# EAGLE board PCB_KioskMB_r3.2 (EAGLE 8.2.1), part 1 of 3
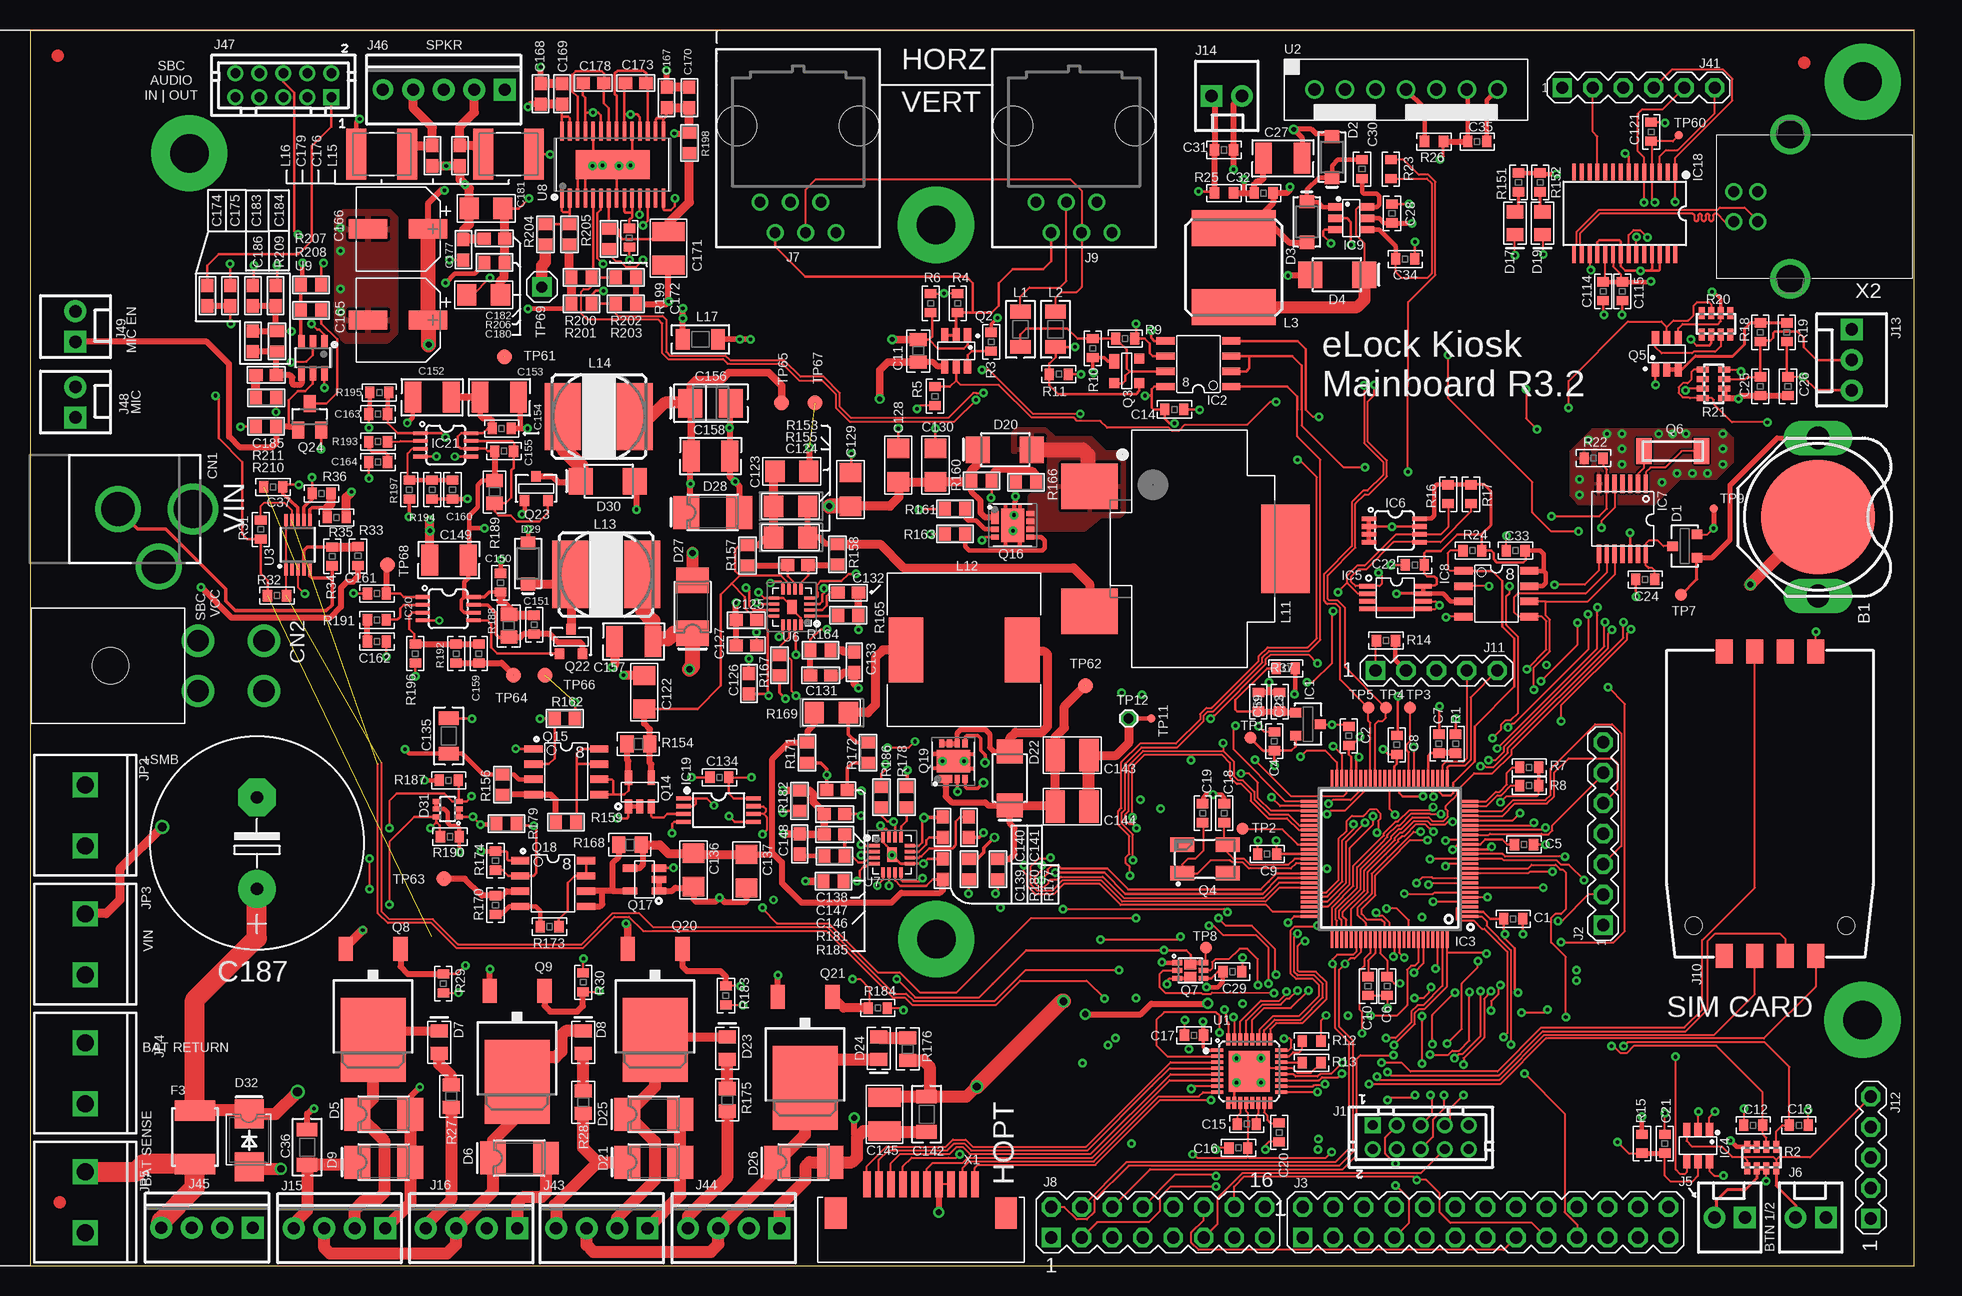
[diagram p0: board, top side]
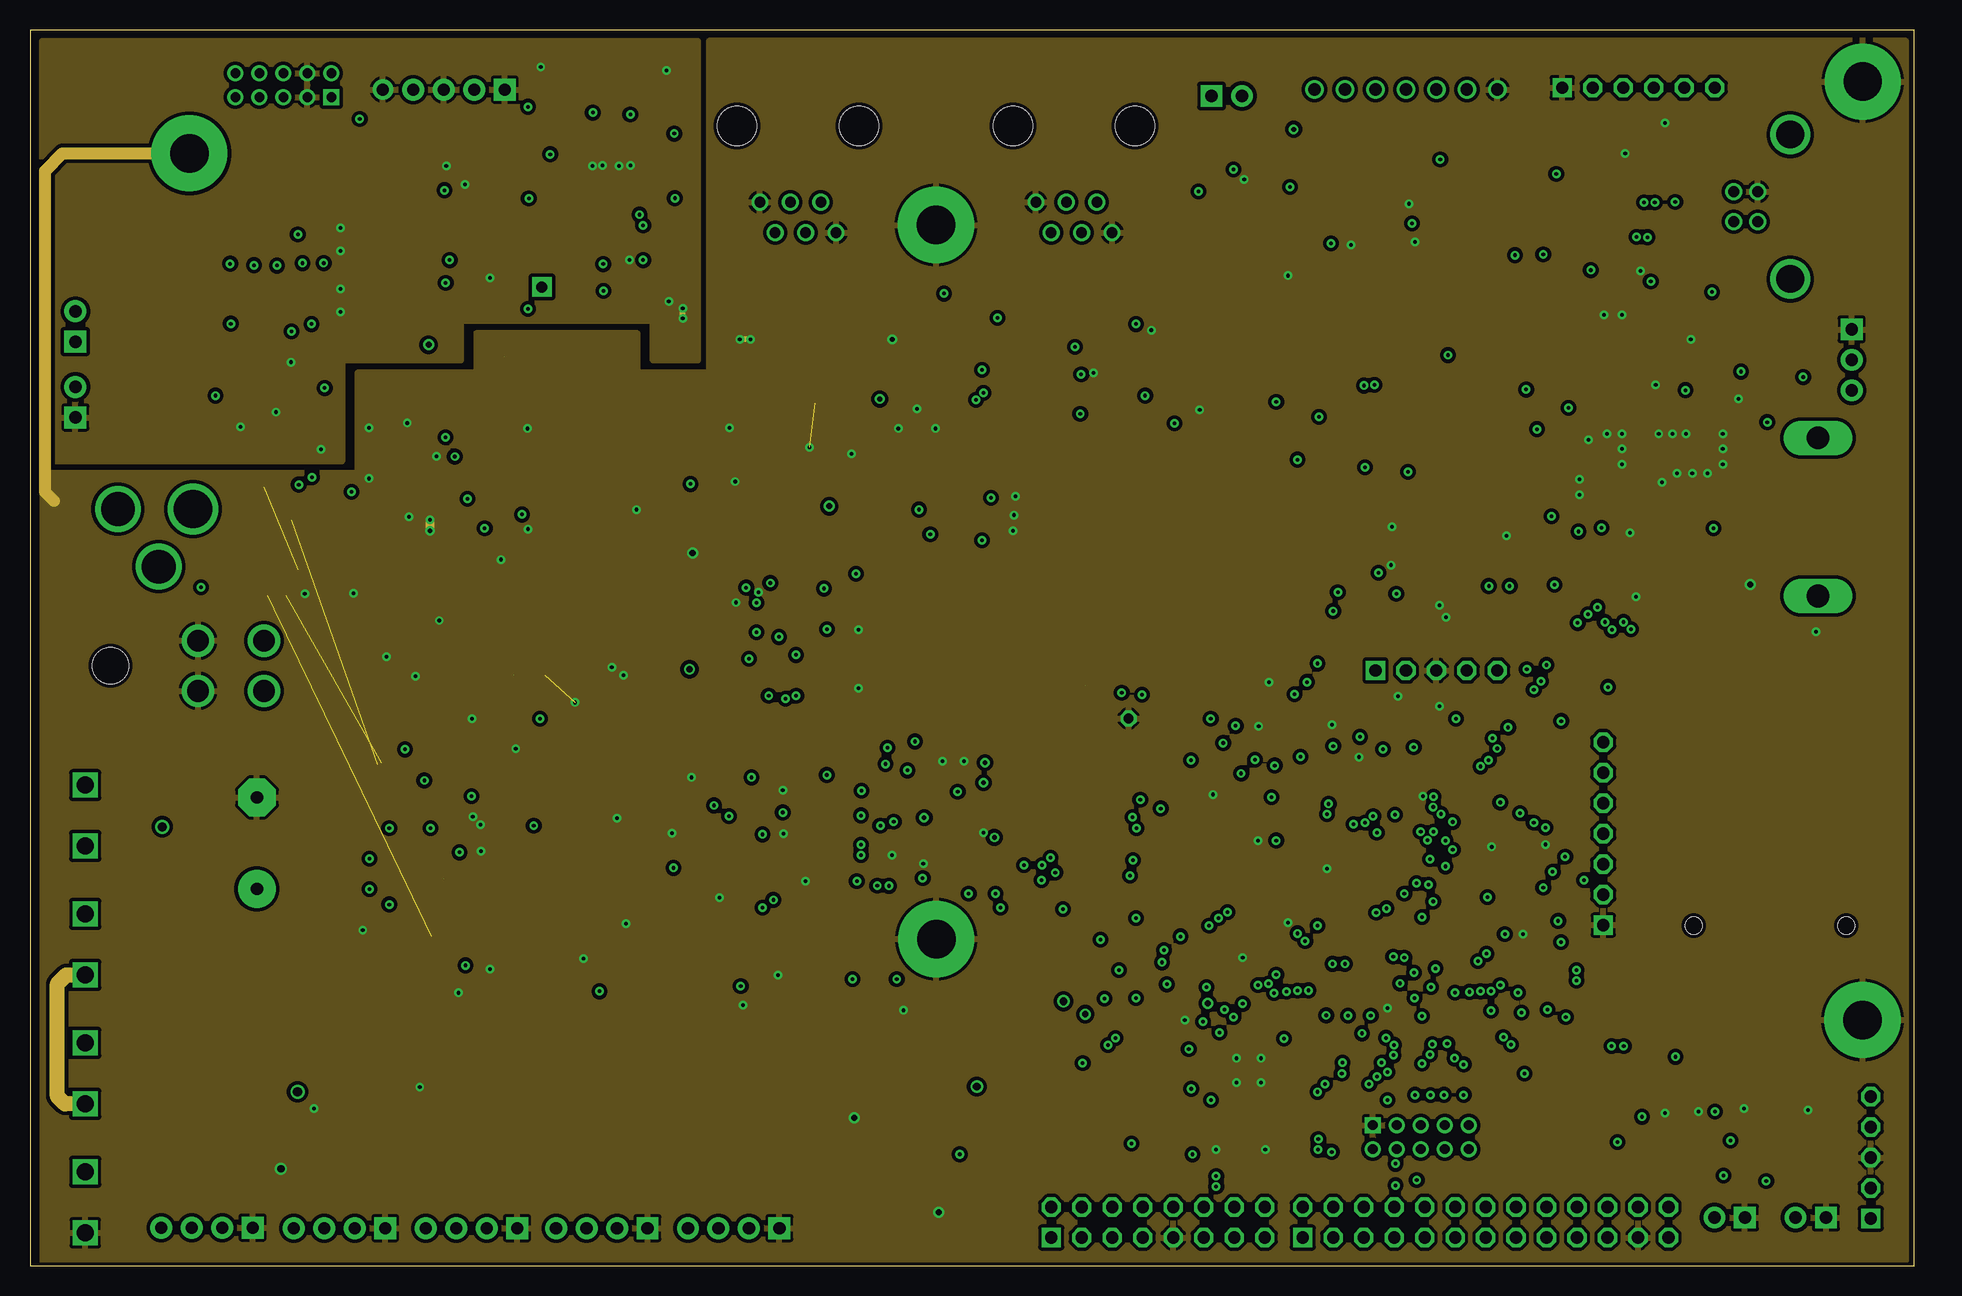
[diagram p1: board, inner layer DGND]
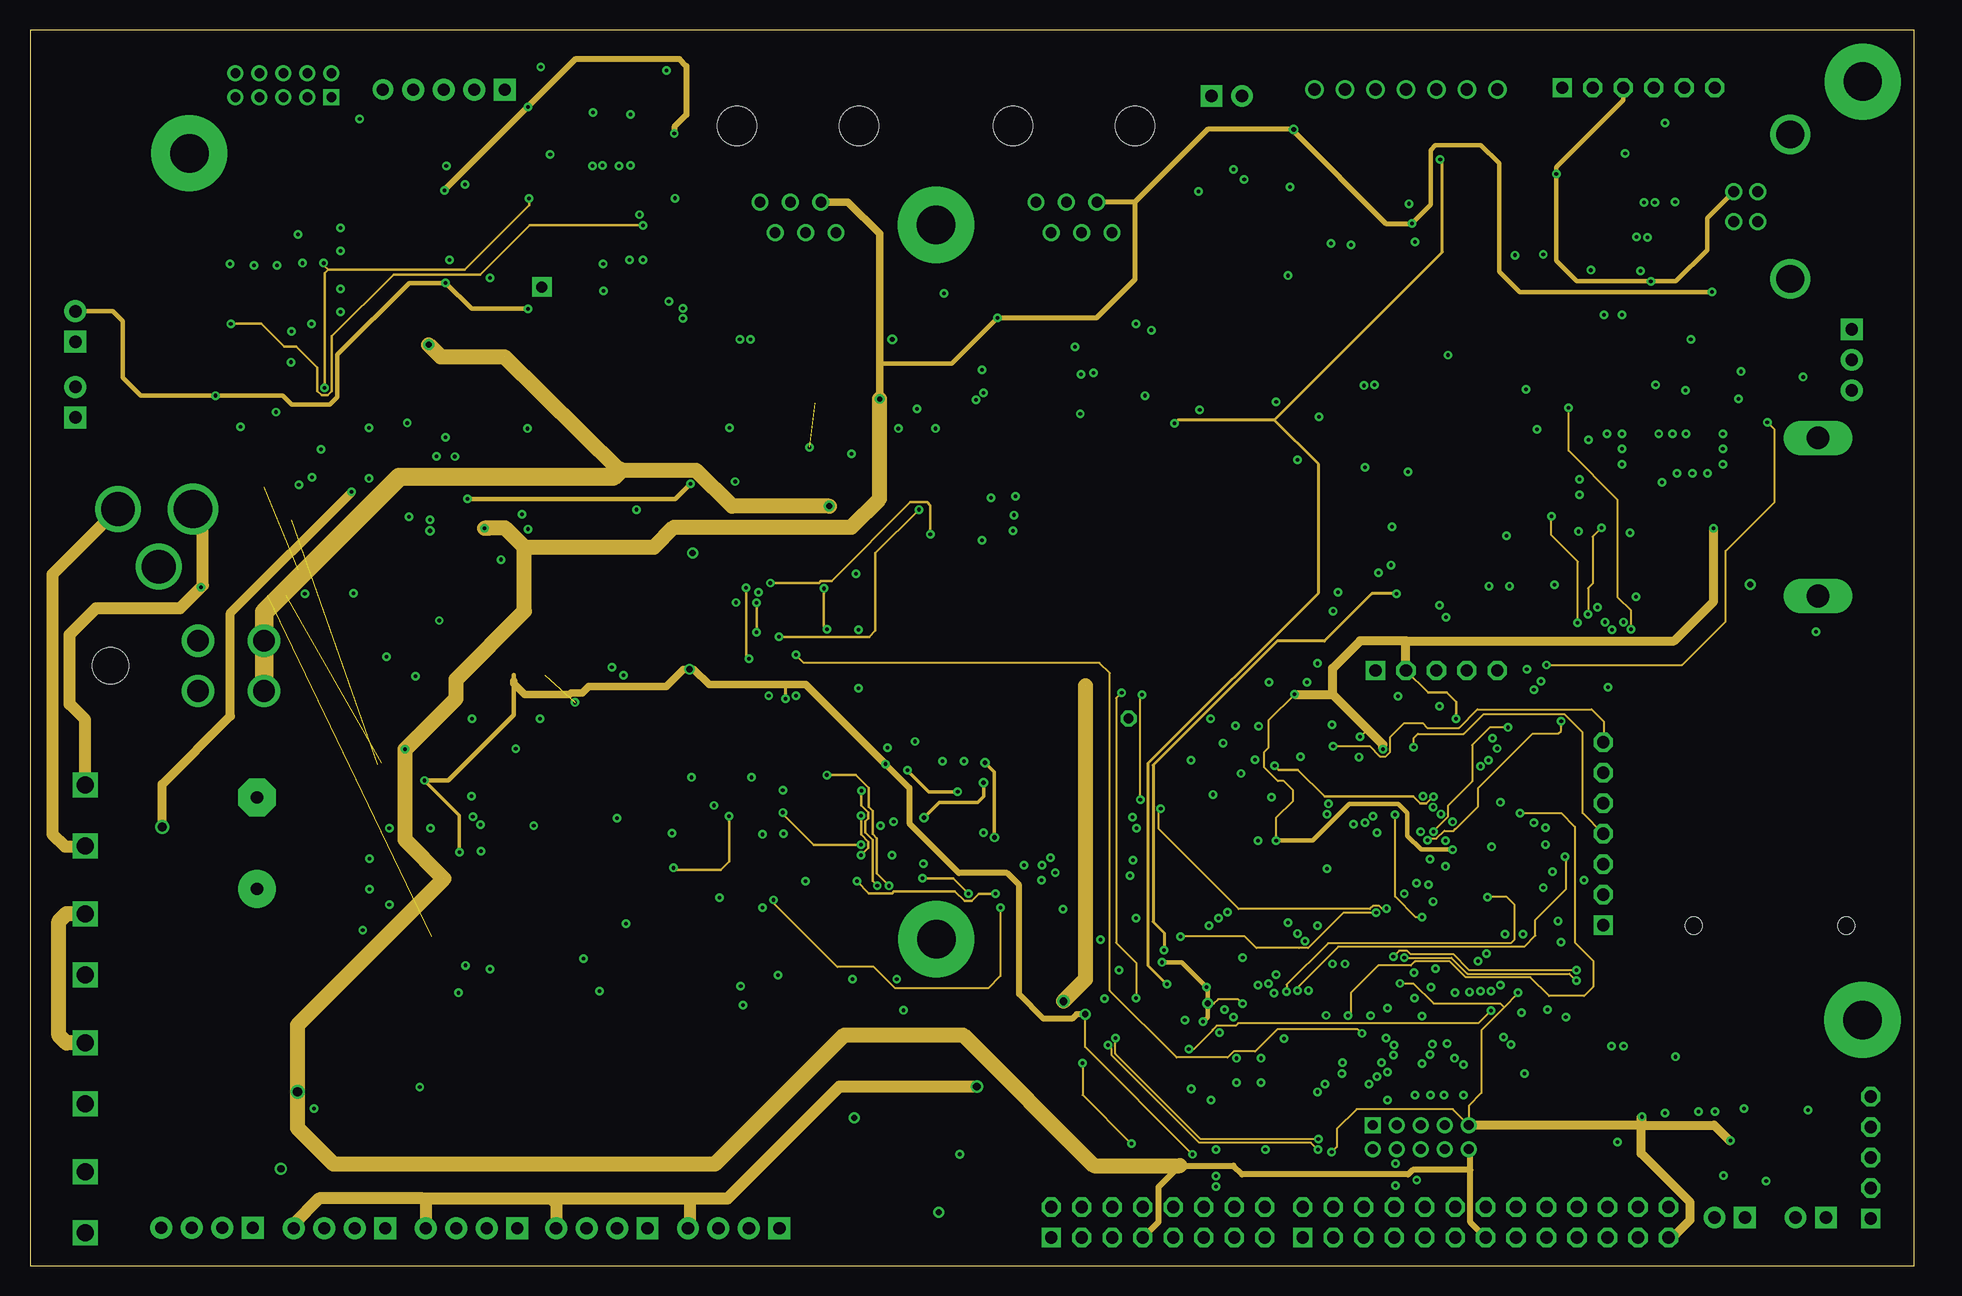
[diagram p2: board, inner layer SUPPLY]
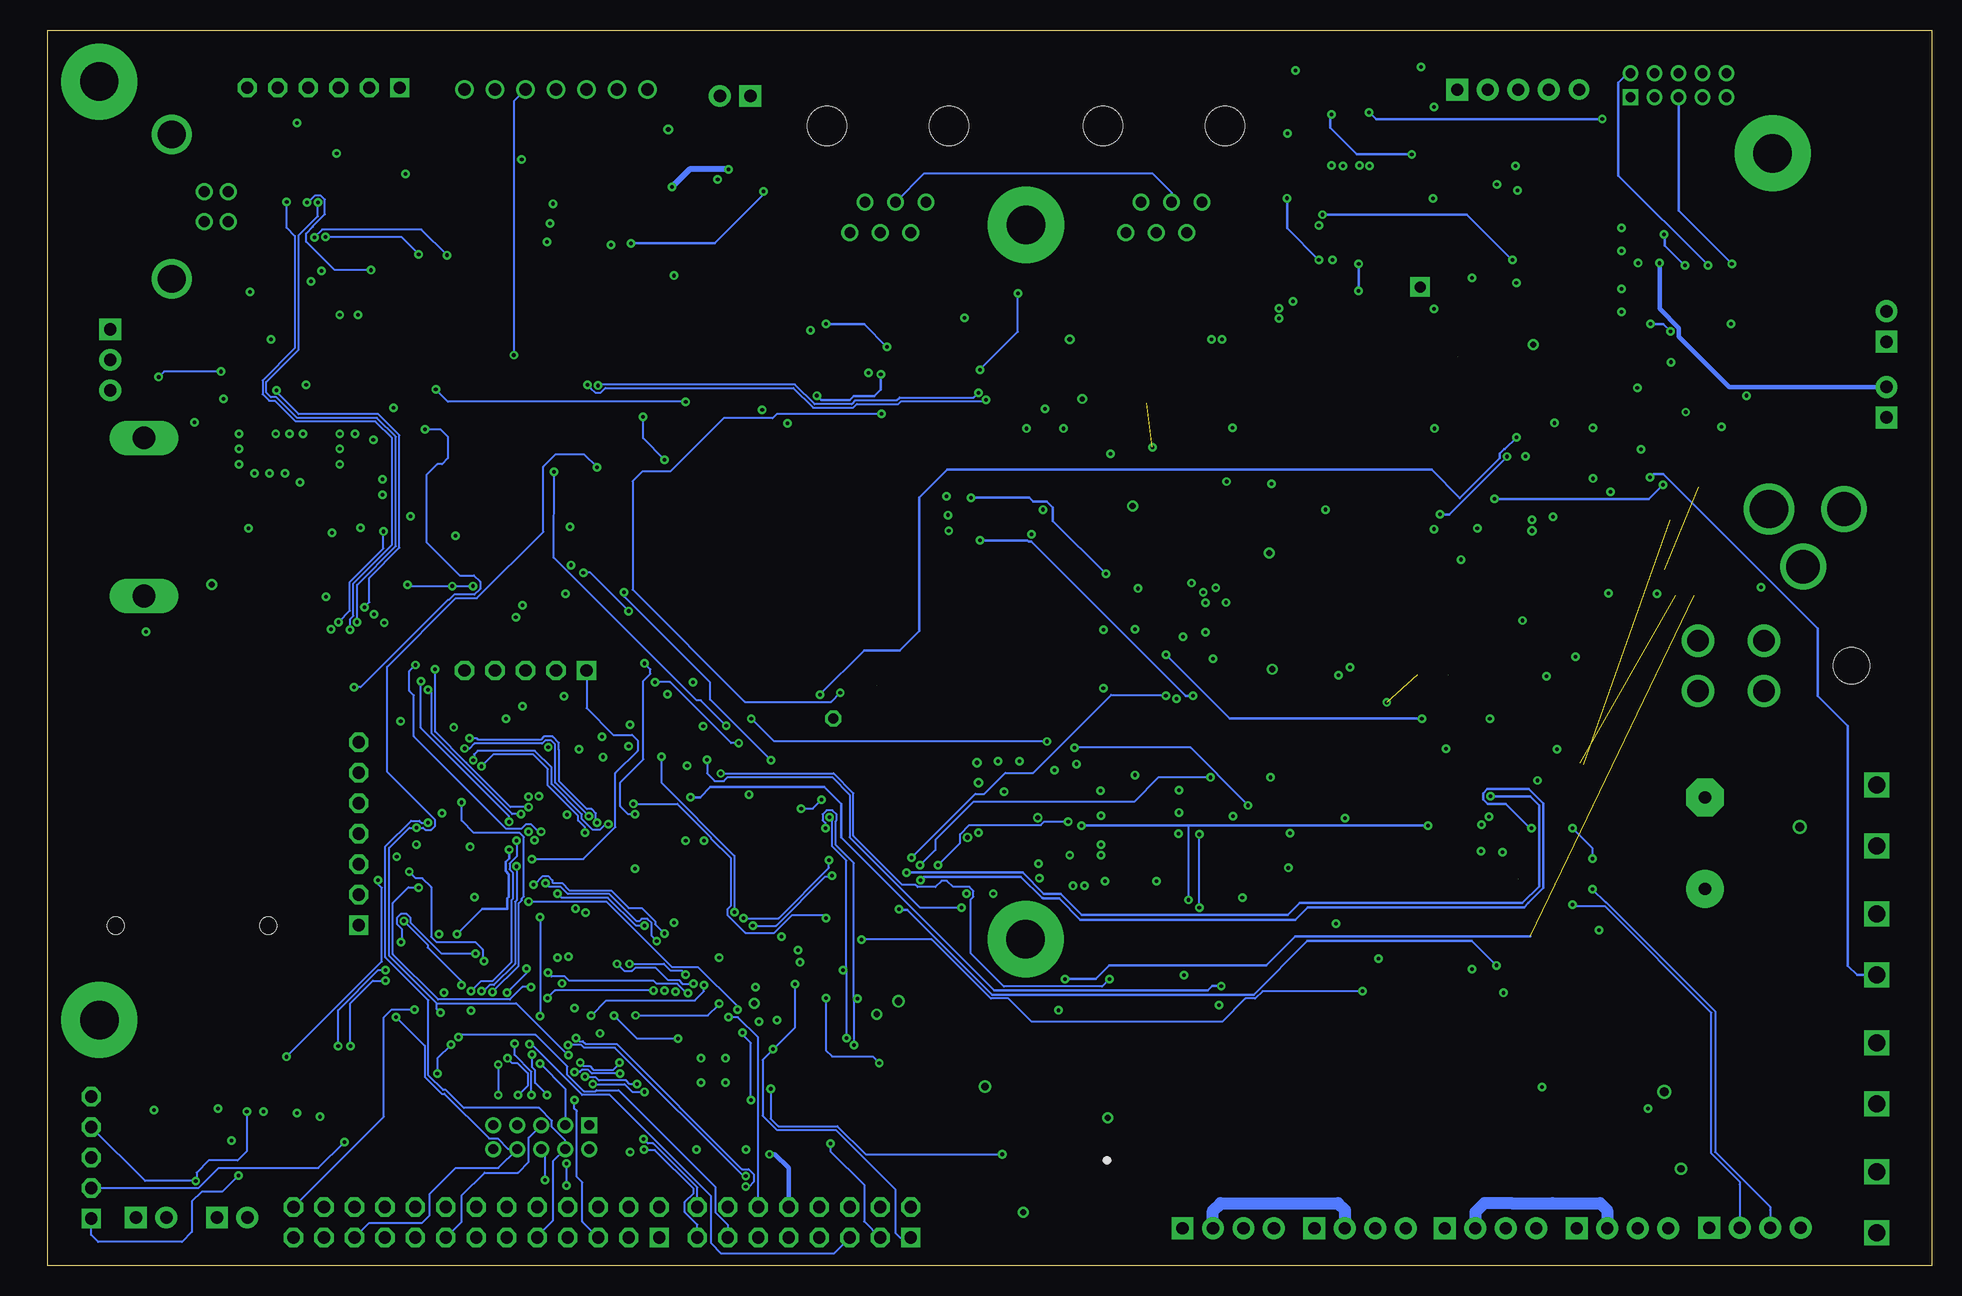
[diagram p3: board, bottom side, seen from below]

Size 157 x 103 mm. Coordinates in mm from the lower left corner, seen from the top.
Outline: 157,103 0,103 0,0 157,0 157,103
Copper layers (1*2*15*16): Top 0.035mm / dielectric 0.33mm / DGND 0.035mm / dielectric 0.8mm / SUPPLY 0.035mm / dielectric 0.33mm / Bottom 0.035mm
Design rules "alleybeachdrc4layer *": minimum track width 6mil, minimum drill 0.3mm, track to track 6mil, track to pad 6mil, pad to pad 6mil, via to via 6mil, smd to smd 6mil, copper to edge 10mil, drill to drill 10mil, minimum pad ring 10mil, minimum via ring 8mil, stop-mask expansion 5mil, vias tented up to drill 0.3mm, thermal gap 10mil

## Footprints (pad centres in the part's own frame; a part is rotated, then mirrored left to right if it is on the bottom)
3001 = drill 1.905 pad 2.413 long: + -6.6,0; +2 6.6,0 | smd 9.5 x 9.5: - 0,0
0603 = smd 0.762 x 0.965: 1 -0.787,0; 2 0.787,0
0805 = smd 1.092 x 1.397: 1 -0.94,0; 2 0.94,0
1210 = smd 1.397 x 2.591: 1 -1.6,0; 2 1.6,0
1206 = smd 1.143 x 1.702: 1 -1.473,0; 2 1.473,0
C1206 = smd 1.6 x 1.8: 1 -1.4,0; 2 1.4,0
C0603 = smd 1.1 x 1: 1 -0.85,0; 2 0.85,0
C1210 = smd 1.6 x 2.7: 1 -1.4,0; 2 1.4,0
3528-POL = smd 2.007 x 2.388: 1 -1.702,0; 2 1.702,0
CAP_6.3MM_DIA_SMT = smd 1.6 x 3.2: 1 0,2.5; 2 0,-2.5
E7,5-18 = drill 1.016 pad 3.15: + -3.81,0 | drill 1.016 pad 3.15 octagon: - 3.81,0
DCJACK_2MM_PTH = drill 2.8: GND 0,7.35; GNDBREAK 4.8,10.75 | drill 3.2: PWR 0,13.6
0039301040 = drill 1.8: 1 -2.1,0; 2 2.1,0; 3 -2.1,5.5; 4 2.1,5.5 | hole 3: 0,-7.3
SOT-23 = smd 0.787 x 0.889: 1 0.991,1.016; 2 -0.94,1.016; 3 0.025,-1.016
SOD-123 = smd 1.1 x 1.2: A 1.7,0; C -1.7,0
SOD-128 = smd 2 x 2.2: A 2.2,0; K -2.3,0
SMA = smd 2.159 x 2.743: A 2.108,-0.002; C -2.311,0.003
0805-POL = smd 1.092 x 1.397: 1+ -0.94,0; 2 0.94,0
SMA' = smd 2.159 x 2.743: + -2.311,0.003; - 2.108,-0.002
SOT-363 = smd 0.42 x 0.6: 1 -0.65,-0.95; 2 0,-0.95; 3 0.65,-0.95; 4 0.65,0.95; 5 0,0.95; 6 -0.65,0.95
SMB = smd 2.4 x 2.4: A 2.2,0; C -2.2,0
1812 = smd 1.702 x 3.4: 1 -2.235,0; 2 2.235,0
STANDOFF-ELECTRICAL = drill 3.2 pad 6.35: P1 0,0
SO08 = smd 0.61 x 1.524: 1 -1.905,-2.743; 2 -0.635,-2.743; 3 0.635,-2.743; 4 1.905,-2.743; 5 1.905,2.743; 6 0.635,2.743; 7 -0.635,2.743; 8 -1.905,2.743
SQFP-S-12X12-100 = smd 0.24 x 1.6: 1 -4.8,-6.6; 2 -4.4,-6.6; 3 -4,-6.6; 4 -3.6,-6.6; 5 -3.2,-6.6; 6 -2.8,-6.6; 7 -2.4,-6.6; 8 -2,-6.6; 9 -1.6,-6.6; 10 -1.2,-6.6; 11 -0.8,-6.6; 12 -0.4,-6.6; 13 0,-6.6; 14 0.4,-6.6; 15 0.8,-6.6; 16 1.2,-6.6; 17 1.6,-6.6; 18 2,-6.6; 19 2.4,-6.6; 20 2.8,-6.6; 21 3.2,-6.6; 22 3.6,-6.6; 23 4,-6.6; 24 4.4,-6.6; 25 4.8,-6.6; 51 4.8,6.6; 52 4.4,6.6; 53 4,6.6; 54 3.6,6.6; 55 3.2,6.6; 56 2.8,6.6; 57 2.4,6.6; 58 2,6.6; 59 1.6,6.6; 60 1.2,6.6; 61 0.8,6.6; 62 0.4,6.6; 63 0,6.6; 64 -0.4,6.6; 65 -0.8,6.6; 66 -1.2,6.6; 67 -1.6,6.6; 68 -2,6.6; 69 -2.4,6.6; 70 -2.8,6.6; 71 -3.2,6.6; 72 -3.6,6.6; 73 -4,6.6; 74 -4.4,6.6; 75 -4.8,6.6 | smd 1.6 x 0.24: 26 6.6,-4.8; 27 6.6,-4.4; 28 6.6,-4; 29 6.6,-3.6; 30 6.6,-3.2; 31 6.6,-2.8; 32 6.6,-2.4; 33 6.6,-2; 34 6.6,-1.6; 35 6.6,-1.2; 36 6.6,-0.8; 37 6.6,-0.4; 38 6.6,0; 39 6.6,0.4; 40 6.6,0.8; 41 6.6,1.2; 42 6.6,1.6; 43 6.6,2; 44 6.6,2.4; 45 6.6,2.8; 46 6.6,3.2; 47 6.6,3.6; 48 6.6,4; 49 6.6,4.4; 50 6.6,4.8; 76 -6.6,4.8; 77 -6.6,4.4; 78 -6.6,4; 79 -6.6,3.6; 80 -6.6,3.2; 81 -6.6,2.8; 82 -6.6,2.4; 83 -6.6,2; 84 -6.6,1.6; 85 -6.6,1.2; 86 -6.6,0.8; 87 -6.6,0.4; 88 -6.6,0; 89 -6.6,-0.4; 90 -6.6,-0.8; 91 -6.6,-1.2; 92 -6.6,-1.6; 93 -6.6,-2; 94 -6.6,-2.4; 95 -6.6,-2.8; 96 -6.6,-3.2; 97 -6.6,-3.6; 98 -6.6,-4; 99 -6.6,-4.4; 100 -6.6,-4.8
SOT23-6 = smd 0.6 x 1.2: 1 -0.95,-1.306; 2 0,-1.306; 3 0.95,-1.306; 4 0.95,1.306; 5 0.003,1.306; 6 -0.95,1.306
TSSOP08-3 = smd 0.38 x 1.4: 1 -0.94,-2.343; 2 -0.305,-2.343; 3 0.33,-2.343; 4 0.965,-2.343; 5 0.965,2.292; 6 0.33,2.292; 7 -0.305,2.292; 8 -0.94,2.292
MSOP-08 = smd 0.38 x 1.2: 1 -1.008,-2.18; 2 -0.358,-2.18; 3 0.292,-2.18; 4 0.942,-2.18; 5 0.942,2.045; 6 0.292,2.045; 7 -0.358,2.045; 8 -1.008,2.045
TSSOP014 = smd 0.356 x 1.524: 1 -1.95,-2.873; 2 -1.305,-2.873; 3 -0.65,-2.873; 4 -0.005,-2.873; 5 0.65,-2.873; 6 1.295,-2.873; 7 1.95,-2.873; 8 1.95,2.962; 9 1.295,2.962; 10 0.65,2.962; 11 -0.005,2.962; 12 -0.65,2.962; 13 -1.305,2.962; 14 -1.95,2.962
SO-08 = smd 0.61 x 1.524: 1 -1.905,-2.743; 2 -0.635,-2.743; 3 0.635,-2.743; 4 1.905,-2.743; 5 1.905,2.743; 6 0.635,2.743; 7 -0.635,2.743; 8 -1.905,2.743
SSOP28DB = smd 0.32 x 1.4: 1 -4.225,-3.45; 2 -3.575,-3.45; 3 -2.925,-3.45; 4 -2.275,-3.45; 5 -1.625,-3.45; 6 -0.975,-3.45; 7 -0.325,-3.45; 8 0.325,-3.45; 9 0.975,-3.45; 10 1.625,-3.45; 11 2.275,-3.45; 12 2.925,-3.45; 13 3.575,-3.45; 14 4.225,-3.45; 15 4.225,3.45; 16 3.575,3.45; 17 2.925,3.45; 18 2.275,3.45; 19 1.625,3.45; 20 0.975,3.45; 21 0.325,3.45; 22 -0.325,3.45; 23 -0.975,3.45; 24 -1.625,3.45; 25 -2.275,3.45; 26 -2.925,3.45; 27 -3.575,3.45; 28 -4.225,3.45
TSSOP8 = smd 0.35 x 1.2: 1 -0.975,-2.925; 2 -0.325,-2.925; 3 0.325,-2.925; 4 0.975,-2.925; 5 0.975,2.925; 6 0.325,2.925; 7 -0.325,2.925; 8 -0.975,2.925
MSOP-08' = smd 0.3 x 1.2: 1 -1.008,-2.18; 2 -0.358,-2.18; 3 0.292,-2.18; 4 0.942,-2.18; 5 0.942,2.045; 6 0.292,2.045; 7 -0.358,2.045; 8 -1.008,2.045
DF11-10DP-2DSA = drill 0.813 pad 1.321 square: 1 4,-1 | drill 0.813 pad 1.321: 2 4,1; 3 2,-1; 4 2,1; 5 0,-1; 6 0,1; 7 -2,-1; 8 -2,1; 9 -4,-1; 10 -4,1
MA07-1 = drill 1.016 pad 1.6 square: 1 -7.62,0 | drill 1.016 pad 1.6 octagon: 2 -5.08,0; 3 -2.54,0; 4 0,0; 5 2.54,0; 6 5.08,0; 7 7.62,0
MA13-2 = drill 1.016 pad 1.6 square: 1 -15.24,-1.27 | drill 1.016 pad 1.6 octagon: 2 -15.24,1.27; 3 -12.7,-1.27; 4 -12.7,1.27; 5 -10.16,-1.27; 6 -10.16,1.27; 7 -7.62,-1.27; 8 -7.62,1.27; 9 -5.08,-1.27; 10 -5.08,1.27; 11 -2.54,-1.27; 12 -2.54,1.27; 13 0,-1.27; 14 0,1.27; 15 2.54,-1.27; 16 2.54,1.27; 17 5.08,-1.27; 18 5.08,1.27; 19 7.62,-1.27; 20 7.62,1.27; 21 10.16,-1.27; 22 10.16,1.27; 23 12.7,-1.27; 24 12.7,1.27; 25 15.24,-1.27; 26 15.24,1.27
3-641215-2 = drill 1.016 pad 1.829 square: 1 2.54,0 | drill 1.016 pad 1.829: 2 0,0
SS-6566-NF = drill 0.889: 1 -3.175,8.89; 2 -1.905,6.35; 3 -0.635,8.89; 4 0.635,6.35; 5 1.905,8.89; 6 3.175,6.35 | hole 3.251: 5.08,0; -5.08,0
MA08-2 = drill 1.016 pad 1.6 square: 1 -8.89,-1.27 | drill 1.016 pad 1.6 octagon: 2 -8.89,1.27; 3 -6.35,-1.27; 4 -6.35,1.27; 5 -3.81,-1.27; 6 -3.81,1.27; 7 -1.27,-1.27; 8 -1.27,1.27; 9 1.27,-1.27; 10 1.27,1.27; 11 3.81,-1.27; 12 3.81,1.27; 13 6.35,-1.27; 14 6.35,1.27; 15 8.89,-1.27; 16 8.89,1.27
CCM03-3504LFT-NR = smd 2 x 1.4: C1 12.7,3.81; C2 12.7,1.27; C3 12.7,-1.27; C4 12.7,-3.81; C5 -12.7,3.81; C6 -12.7,1.27; C7 -12.7,-1.27; C8 -12.7,-3.81 | hole 1.422: 10.16,6.35; 10.16,-6.35
MA05-1 = drill 1.016 pad 1.6 square: 1 -5.08,0 | drill 1.016 pad 1.6 octagon: 2 -2.54,0; 3 0,0; 4 2.54,0; 5 5.08,0
3-641215-3 = drill 1.016 pad 1.829 square: 1 2.54,0 | drill 1.016 pad 1.829: 2 0,0; 3 -2.54,0
3-641215-4 = drill 1.016 pad 1.829 square: 1 3.81,0 | drill 1.016 pad 1.829: 2 1.27,0; 3 -1.27,0; 4 -3.81,0
MA06-1 = drill 1.016 pad 1.6 square: 1 -6.35,0 | drill 1.016 pad 1.6 octagon: 2 -3.81,0; 3 -1.27,0; 4 1.27,0; 5 3.81,0; 6 6.35,0
3-641215-5 = drill 1.016 pad 1.829 square: 1 5.08,0 | drill 1.016 pad 1.829: 2 2.54,0; 3 0,0; 4 -2.54,0 | drill 1.016 pad 1.702: 5 -5.08,0
1X02_2.54_SCREWTERM = drill 1.4 square: P1 5.08,0; P2 0,0
NRS8030 = smd 7 x 3: 1 0,-3.3; 2 0,3.3
L_SER20XX = smd 3.81 x 4.699: 1 -5.207,-8.319; 2 5.207,-8.319 | smd 7.366 x 4.064: 3 0,8.001
L_SRR1280 = smd 5.4 x 2.9: 1 0,4.85; 2 0,-4.85
CR75 = smd 5.6 x 3: 1 0,-3; 2 0,3
L1812 = smd 1.66 x 4.22: 1 -2.12,0; 2 2.12,0
SSOT-6 = smd 0.6 x 1.2: 1 -0.95,-1.306; 2 0,-1.306; 3 0.95,-1.306; 4 0.95,1.306; 5 0.003,1.306; 6 -0.95,1.306
SOT-143 = smd 1.194 x 0.838: 1 -0.813,-1.041 | smd 0.838 x 0.838: 2 0.991,-1.041; 3 0.991,1.041; 4 -1.016,1.041
7B = smd 2 x 1.2: 1 -1.9,-1.2; 2 1.9,-1.2; 3 1.9,1.2; 4 -1.9,1.2
CM519 = smd 1.3 x 2.2: 1 -2.4,0; 2 2.4,0
MICRO_FET = smd 0.42 x 0.8: 1 -0.65,-1.1; 2 0,-1.1; 3 0.65,-1.1; 4 0.65,1.1; 5 0,1.1; 6 -0.65,1.1 | smd 0.8 x 1: P1 -0.5,0; P2 0.5,0
TO252 = smd 1.2 x 2: 1 -2.28,-4.8; 2 2.28,-4.8 | smd 5.4 x 7: 3 0,2.8
SOT23-5 = smd 0.6 x 1.2: 1 -0.95,-1.206; 2 0,-1.206; 3 0.95,-1.206; 4 0.95,1.206; 5 -0.95,1.206
SON8_3.3X3.3_TI = smd 1.09 x 0.65: 1_2 -0.65,-1.475 | smd 0.44 x 0.65: 3 0.325,-1.475; 4 0.975,-1.475; 5 0.975,1.475; 6 0.325,1.475; 7 -0.325,1.475; 8 -0.975,1.475 | smd 2.8 x 1.9: EP 0,0
SOT23 = smd 1 x 1.4: 1 -0.95,-1.1; 2 0.95,-1.1; 3 0,1.1
0603-ARRAY = smd 0.5 x 1: 1 -1.2,-0.9; 2 -0.4,-0.9; 3 0.4,-0.9; 4 1.2,-0.9; 5 1.2,0.9; 6 0.4,0.9; 7 -0.4,0.9; 8 -1.2,0.9
0603-0RTOP = smd 0.762 x 0.965: 1 -0.787,0; 2 0.787,0
R1206 = smd 1.6 x 1.803: 1 -1.422,0; 2 1.422,0
R0603 = smd 1 x 1.1: 1 -0.85,0; 2 0.85,0
SMD_ROUND_1MM = smd 1 x 1: P$1 0,0
SMD_ROUND_07MM = smd 0.7 x 0.7: P$1 0,0
TP_0.8_1.2 = drill 0.813 pad 1.219 octagon: 1 0,0
B1,27 = smd 1.27 x 1.27: TP 0,0
P1-13@1 = drill 0.914 pad 1.626 square: 1 0,0
LFCSP_5X5_032 = smd 1 x 0.3: 1 -2.65,1.75; 2 -2.65,1.25; 3 -2.65,0.75; 4 -2.65,0.25; 5 -2.65,-0.25; 6 -2.65,-0.75; 7 -2.65,-1.25; 8 -2.65,-1.75; 17 2.65,-1.75; 18 2.65,-1.25; 19 2.65,-0.75; 20 2.65,-0.25; 21 2.65,0.25; 22 2.65,0.75; 23 2.65,1.25; 24 2.65,1.75 | smd 0.3 x 1: 9 -1.75,-2.65; 10 -1.25,-2.65; 11 -0.75,-2.65; 12 -0.25,-2.65; 13 0.25,-2.65; 14 0.75,-2.65; 15 1.25,-2.65; 16 1.75,-2.65; 25 1.75,2.65; 26 1.25,2.65; 27 0.75,2.65; 28 0.25,2.65; 29 -0.25,2.65; 30 -0.75,2.65; 31 -1.25,2.65; 32 -1.75,2.65 | smd 3.4 x 3.4: PAD 0,0
HRXL-MAXSONAR-WRC-MB7387 = drill 1.016: 1 2.54,2.54; 2 5.08,2.54; 3 7.62,2.54; 4 10.16,2.54; 5 12.7,2.54; 6 15.24,2.54; 7 17.78,2.54
MSOP10 = smd 0.3 x 1: 1 -1,-2.05; 2 -0.5,-2.05; 3 0,-2.05; 4 0.5,-2.05; 5 1,-2.05; 6 1,2.05; 7 0.5,2.05; 8 0,2.05; 9 -0.5,2.05; 10 -1,2.05
QFN16_3X3_EP = smd 0.85 x 0.28: 1 -1.475,0.75; 2 -1.475,0.25; 3 -1.475,-0.25; 4 -1.475,-0.75; 9 1.475,-0.75; 10 1.475,-0.25; 11 1.475,0.25; 12 1.475,0.75 | smd 0.28 x 0.85: 5 -0.75,-1.475; 6 -0.25,-1.475; 7 0.25,-1.475; 8 0.75,-1.475; 13 0.75,1.475; 14 0.25,1.475; 15 -0.25,1.475; 16 -0.75,1.475 | smd 0.8 x 1.2: EP 0,0
TSSOP28_EP = smd 1.6 x 0.3: 1 -2.8,4.225; 2 -2.8,3.575; 3 -2.8,2.925; 4 -2.8,2.275; 5 -2.8,1.625; 6 -2.8,0.975; 7 -2.8,0.325; 8 -2.8,-0.325; 9 -2.8,-0.975; 10 -2.8,-1.625; 11 -2.8,-2.275; 12 -2.8,-2.925; 13 -2.8,-3.575; 14 -2.8,-4.225; 15 2.8,-4.225; 16 2.8,-3.575; 17 2.8,-2.925; 18 2.8,-2.275; 19 2.8,-1.625; 20 2.8,-0.975; 21 2.8,-0.325; 22 2.8,0.325; 23 2.8,0.975; 24 2.8,1.625; 25 2.8,2.275; 26 2.8,2.925; 27 2.8,3.575; 28 2.8,4.225 | smd 2.4 x 6.17: EP 0,0
SOT23-6' = smd 0.55 x 1.2: 1 -0.95,-1.3; 2 0,-1.3; 3 0.95,-1.3; 4 0.95,1.3; 5 0,1.3; 6 -0.95,1.3
CON-FPC-1.0MM-10POS = smd 0.6 x 2.2: 1 -4.5,0; 2 -3.5,0; 3 -2.5,0; 4 -1.5,0; 5 -0.5,0; 6 0.5,0; 7 1.5,0; 8 2.5,0; 9 3.5,0; 10 4.5,0 | smd 1.8 x 2.6: P$1 -7.1,-2.4; P$2 7.1,-2.4
85-32004-10X = drill 0.92 pad 1.27: 1 4.71,-1.25; 2 4.71,1.25; 3 2.71,1.25; 4 2.71,-1.25 | drill 2.3 pad 3: M1 0,6.02; M2 0,-6.02

## Placement (x,y rotation side)
B1  3001/3.3V  [3001]  149,62.4 270 top
C1  1u/10V  [0603]  123.6,28.9 0 top
C2  0.1uF  [0603]  109.9,44.15 90 top
C4  100nF  [0603]  103.7,43.7 90 top
C5  0.1uF  [0603]  124.5,35.1 0 top
C6  0.1uF  [0603]  113.1,23.3 270 top
C7  1u/10V  [0603]  117.4,43.5 90 top
C8  1u/10V  [0603]  113.9,43.4 90 top
C9  0.1uF  [0603]  103.1,34.3 180 top
C10  10uF/4V  [0603]  111.5,23.3 90 top
C11  4.7uF/16V  [0805]  74.03,76.25 90 top
C12  10nF  [0603]  143.6,11.7 180 top
C13  10nF  [0603]  147.4,11.7 0 top
C14  1u/6.3V  [0603]  95.36,71.37 0 top
C15  1u/10V  [0603]  101.4,11.8 0 top
C16  4.7uF/6.3V  [0603]  100.7,9.8 0 top
C17  0.1uF  [0603]  97,19.2 180 top
C18  18pF  [0603]  99.52,37.71 270 top
C19  18pF  [0603]  97.72,37.71 270 top
C20  4.7uF/6.3V  [0603]  104.1,11.1 90 top
C21  0.1uF  [0603]  136.24,10.16 90 top
C22  0.1uF  [0603]  115.4,58.4 180 top
C23  10uF/4V  [0603]  104.14,46.99 90 top
C24  1u/10V  [0603]  134.6,57.2 180 top
C25  10nF  [0603]  144.2,73.3 270 top
C26  10nF  [0603]  146.5,73.3 270 top
C27  22u/16V  [1210]  104.4,92.3 180 top
C28  1uF/16V  [0603]  113.5,87.7 90 top
C29  10uF/10V  [0603]  100.2,24.5 180 top
C30  0.1uF  [0603]  111,91.4 270 top
C31  1uF/16V  [0603]  99.5,93 180 top
C32  1uF/16V  [0603]  102.8,89.4 180 top
C33  0.1uF  [0603]  123.8,59.6 180 top
C34  dnp  [0603]  114.6,83.9 0 top
C35  0.1uF  [0603]  120.6,93.7 180 top
C36  10uF/35V  [1206]  23.09,9.86 90 top
C37  0.1uF  [0603]  20.26,64.91 180 top
C59  10uF/4V  [0603]  102.36,46.99 90 top
C114  0.1u  [0603]  131.09,81.21 90 top
C115  4.7uF/6.3V  [0603]  132.69,81.21 90 top
C121  0.1u  [0603]  135.09,94.51 270 top
C122  22uF,25V,1206  [C1206]  51.19,47.79 90 top
C123  22uF,25V,1206  [C1206]  63.49,66.19 0 top
C124  100pF,C0G  [C0603]  63.99,58.39 0 top
C125  0.1uF  [C0603]  59.7,53.81 180 top
C126  0.1uF  [C0603]  59.9,48.51 270 top
C127  4.7uF/6.3V  [C0603]  59.7,51.71 180 top
C128  22uF,25V,1206  [C1206]  72.35,66.73 90 top
C129  22uF,25V,1206  [C1206]  68.39,64.7 90 top
C130  22uF,25V,1206  [C1206]  75.45,66.73 90 top
C131  130pF,C0G  [C0603]  65.89,49.19 0 top
C132  0.1uF  [C0603]  68.19,56.09 0 top
C133  15nF  [C0603]  68.69,50.29 270 top
C134  10nF  [0603]  57.45,40.69 180 top
C135  10uF/35V  [1206]  34.89,44.15 90 top
C136  22uF,25V,1206  [C1206]  55.29,32.98 270 top
C137  22uF,25V,1206  [C1206]  59.69,32.88 270 top
C138  100pF,C0G  [C0603]  67.25,39.64 0 top
C139  0.1uF  [C0603]  76.05,33.04 90 top
C140  0.1uF  [C0603]  76.05,36.54 90 top
C141  4.7uF/6.3V  [C0603]  78.25,36.54 270 top
C142  10uF/35V  [1206]  74.72,12.61 270 top
C143  10uF,50V,1210  [C1210]  86.85,42.54 0 top
C144  10uF,50V,1210  [C1210]  86.85,38.24 0 top
C145  10uF,50V,1210  [C1210]  71.22,12.61 270 top
C146  100pF  [C0603]  67.05,35.94 180 top
C147  0.1uF  [C0603]  67.05,37.64 180 top
C148  10nF  [C0603]  64.15,35.14 90 top
C149  22u/16V  [1210]  34.91,58.82 180 top
C150  0.1uF  [0603]  39.21,56.92 90 top
C151  1nF  [0603]  42.01,53.42 270 top
C152  22u/16V  [1210]  33.51,72.38 180 top
C153  22u/16V  [1210]  39.11,72.38 0 top
C154  0.1uF  [0603]  39.31,69.78 0 top
C155  1nF  [0603]  39.51,67.88 0 top
C156  TCJB157M006R0045  [3528-POL]  56.71,71.88 0 top
C157  47u/6.3V  [1210]  50.31,52.02 180 top
C158  47u/6.3V  [1210]  56.71,67.48 0 top
C159  5pF  [0603]  37.41,51.02 270 top
C160  15pF  [0603]  35.21,64.68 270 top
C161  0.1uF  [0603]  28.91,56.02 180 top
C162  220pF  [0603]  28.91,52.02 0 top
C163  0.1uF  [0603]  29.01,70.98 180 top
C164  330pF  [0603]  29.01,66.98 180 top
C165  220uF,16V,AL  [CAP_6.3MM_DIA_SMT]  30.68,78.82 270 top
C166  220uF,16V,AL  [CAP_6.3MM_DIA_SMT]  30.68,86.42 270 top
C167  0.1uF  [C0603]  53.05,97.37 90 top
C168  0.1uF  [C0603]  42.55,97.67 90 top
C169  1.0nF,50V  [C0603]  44.35,97.67 90 top
C170  1.0nF,50V  [C0603]  54.95,97.37 90 top
C171  10uF,50V,1210  [C1210]  53.21,84.8 270 top
C172  1uF,25V  [0603]  49.95,85.67 270 top
C173  0.47uF  [C0603]  50.48,98.57 180 top
C174  0.47uF  [C0603]  14.78,80.84 270 top
C175  0.47uF  [C0603]  16.68,80.84 270 top
C176  1.0nF,50V  [C0603]  35.83,92.52 270 top
C177  0.47uF  [C0603]  36.12,84.67 270 top
C178  0.47uF  [C0603]  46.95,98.57 180 top
C179  1.0nF,50V  [C0603]  33.53,92.52 270 top
C180  22uF,25V,1206  [C1206]  37.81,80.92 180 top
C181  22uF,25V,1206  [C1206]  38.01,88.12 180 top
C182  1uF,25V  [C0603]  38.71,85.62 180 top
C183  3.3uF,16V  [C0603]  18.58,80.84 90 top
C184  3.3uF,16V  [C0603]  20.48,80.84 90 top
C185  3.3uF,16V  [C0603]  19.68,74.24 180 top
C186  220pF  [C0603]  18.58,77.04 90 top
C187  2mF/16V  [E7,5-18]  18.91,35.22 90 top
CN1  [DCJACK_2MM_PTH]  -0.02,63.07 270 top
CN2  0039301040  [0039301040]  14,50 270 top
D1  BAS70-05E6327  [SOT-23]  137.9,60 270 top
D2  DNP  [SOD-123]  108.5,92.4 90 top
D3  STPS0540Z  [SOD-123]  106.4,87 270 top
D4  PMEG3030BEP  [SOD-128]  108.9,82.6 180 top
D5  SS14  [SMA]  29.59,12.61 0 top
D6  SS14  [SMA]  40.9,8.96 0 top
D7  LED-GR  [0805-POL]  34.09,18.61 270 top
D8  LED-GR  [0805-POL]  46.09,18.61 270 top
D9  SMAJ26A  [SMA']  29.59,8.61 0 top
D17  LED-GR  [0805-POL]  123.75,86.89 90 top
D19  LED-GR  [0805-POL]  126.05,86.89 90 top
D20  PMEG3030BEP  [SOD-128]  81.29,68.01 0 top
D21  SMAJ26A  [SMA']  52.09,8.61 0 top
D22  PMEG3030BEP  [SOD-128]  81.65,40.64 90 top
D23  LED-GR  [0805-POL]  58.09,18.11 270 top
D24  LED-GR  [0805-POL]  70.72,18.11 90 top
D25  SS14  [SMA]  52.09,12.61 0 top
D26  SS14  [SMA]  64.59,8.61 0 top
D27  SMLVT3V3  [SMA']  55.21,55.02 90 top
D28  SMAJ5.0A  [SMA']  57.01,62.78 0 top
D29  STPS0540Z  [SOD-123]  41.51,58.52 90 top
D30  PMEG3030BEP  [SOD-128]  48.21,65.38 0 top
D31  BAT54BRW-7F  [SOT-363]  34.79,38.05 90 top
D32  P6SMB16A  [SMB]  18.27,10.44 270 top
DRILEGEND  [DRILEGEND]  -18.47,-15.09 0 top  (outside the outline)
F3  2920L250DR  [1812]  13.74,10.7 90 top
FID1  [REF]  2.49,5.26 0 top
FID2  [REF]  147.87,100.27 0 top
FID3  [REF]  2.3,100.83 0 top
H1  STANDOFF_ELECTRICAL  [STANDOFF-ELECTRICAL]  13.28,92.72 0 top
H2  STANDOFF_ELECTRICAL  [STANDOFF-ELECTRICAL]  75.53,27.21 0 top
H3  STANDOFF_ELECTRICAL  [STANDOFF-ELECTRICAL]  152.72,20.47 0 top
H4  STANDOFF_ELECTRICAL  [STANDOFF-ELECTRICAL]  152.73,98.69 0 top
H5  STANDOFF_ELECTRICAL  [STANDOFF-ELECTRICAL]  75.5,86.75 0 top
IC1  ISL60002DIH325Z-TK  [SOT-23]  106.5,45.1 90 top
IC2  SN65HVD12D  [SO08]  97.36,75.17 90 top
IC3  PIC24FJ256GA110-I/PT  [SQFP-S-12X12-100]  113.3,33.9 90 top
IC4  PIC10F200T-I/OT  [SOT23-6]  139,10 180 top
IC5  LM75ADP  [TSSOP08-3]  113.8,55.7 270 top
IC6  24LC32A-I/MS  [MSOP-08]  113.76,61.24 270 top
IC7  PCF2123TS/1-T  [TSSOP014]  132.7,62.3 180 top
IC8  M25P16-VMN6P  [SO-08]  122.2,56 270 top
IC9  LM3405AXMK/NOPB  [SOT23-6]  110.1,87.3 270 top
IC18  FT232RL  [SSOP28DB]  132.89,87.71 180 top
IC19  MCP6022-I/ST  [TSSOP8]  57.38,37.97 270 top
IC20  LTC1771EMS8  [MSOP-08']  34.91,54.72 270 top
IC21  LTC1771EMS8  [MSOP-08']  34.71,68.38 270 top
J1  DF11-10DP-2DSA(01)  [DF11-10DP-2DSA]  115.9,10.7 180 top
J2  [MA07-1]  131.1,36 90 top
J3  [MA13-2]  121.3,3.6 0 top
J5  3-641215-2  [3-641215-2]  140.37,4 0 top
J6  3-641215-2  [3-641215-2]  147.13,4 0 top
J7  SS-6566-NF  [SS-6566-NF]  64,95 180 top
J8  TSW-108-07-G-D  [MA08-2]  94,3.6 0 top
J9  SS-6566-NF  [SS-6566-NF]  87,95 180 top
J10  CCM03-3504LFT-NR  [CCM03-3504LFT-NR]  145,38.5 270 top
J11  [MA05-1]  117.2,49.6 0 top
J12  [MA05-1]  153.4,9 90 top
J13  3-641215-3  [3-641215-3]  151.8,75.5 90 top
J14  3-641215-2  [3-641215-2]  101,97.5 180 top
J15  3-641215-4  [3-641215-4]  25.79,3.11 0 top
J16  3-641215-4  [3-641215-4]  36.78,3.11 0 top
J41  [MA06-1]  134.04,98.19 0 top
J43  3-641215-4  [3-641215-4]  47.65,3.11 0 top
J44  3-641215-4  [3-641215-4]  58.64,3.11 0 top
J45  3-641215-4  [3-641215-4]  14.75,3.16 0 top
J46  3-641215-5  [3-641215-5]  34.48,98.03 0 top
J47  DF11-10DP-2DSA(01)  [DF11-10DP-2DSA]  21.12,98.39 0 top
J48  3-641215-2  [3-641215-2]  3.79,73.24 270 top
J49  3-641215-2  [3-641215-2]  3.79,79.54 270 top
JP2  [1X02_2.54_SCREWTERM]  4.6,40.05 270 top
JP3  [1X02_2.54_SCREWTERM]  4.6,29.3 270 top
JP4  [1X02_2.54_SCREWTERM]  4.6,18.56 270 top
JP5  [1X02_2.54_SCREWTERM]  4.6,7.81 270 top
L1  HI1206T500R-00  [1206]  82.53,78.05 90 top
L2  HI1206T500R-00  [1206]  85.46,78.05 90 top
L3  NRS8030T150MJGJ  [NRS8030]  100.3,83.2 0 top
L11  SER2013-472MLD  [L_SER20XX]  96.62,59.74 270 top
L12  SRR1280-150M  [L_SRR1280]  77.85,51.32 270 top
L13  CR75-330KC  [CR75]  48.01,57.62 270 top
L14  CR75NP-220KC  [CR75]  47.41,70.78 270 top
L15  HI1812V101R-10  [L1812]  39.88,92.65 0 top
L16  HI1812V101R-10  [L1812]  29.31,92.65 180 top
L17  HI1206T500R-00  [1206]  55.87,77.21 180 top
Q2  FDC6330L  [SSOT-6]  77.18,76.25 180 top
Q3  SR3.3.TCT  [SOT-143]  91.4,74.57 270 top
Q4  7B-28.63636MAAJ-T  [7B]  97.9,33.9 0 top
Q5  FDC6324L  [SSOT-6]  136.4,76 0 top
Q6  CM519 32.768KDZF-UT  [CM519]  136.9,67.9 0 top
Q7  SSM6P49NU,LFPZ  [MICRO_FET]  96.7,24.6 270 top
Q8  IPD30N06S2L-23  [TO252]  28.59,21.61 180 top
Q9  IPD30N06S2L-23  [TO252]  40.59,18.11 180 top
Q14  TSM9938HEUK+T  [SOT23-5]  50.82,39.47 0 top
Q15  SI4564DY  [SO-08]  44.69,41.16 270 top
Q16  CSD87331Q3D  [SON8_3.3X3.3_TI]  81.89,61.71 270 top
Q17  TSM9938HEUK+T  [SOT23-5]  51.19,32.18 90 top
Q18  SI4564DY  [SO-08]  43.59,31.85 270 top
Q19  CSD87331Q3D  [SON8_3.3X3.3_TI]  76.95,42.04 0 top
Q20  IPD30N06S2L-23  [TO252]  52.09,21.61 180 top
Q21  IPD30N06S2L-23  [TO252]  64.59,17.61 180 top
Q22  FDN352AP  [SOT-23]  45.11,52.02 180 top
Q23  FDN352AP  [SOT-23]  42.21,64.78 180 top
Q24  BSS138  [SOT23]  23.3,70.75 0 top
R1  47R  [0603]  118.8,43.5 90 top
R2  100K  [0603-ARRAY]  144.3,9 0 top
R3  1M  [0603]  80.09,77.01 270 top
R4  1M  [0603]  77.31,80.22 270 top
R5  1M  [0603]  75.42,72.47 90 top
R6  1M  [0603]  75.06,80.22 90 top
R7  100K  [0603]  124.94,41.53 0 top
R8  3.57K  [0603]  124.94,40.01 0 top
R9  1M  [0603]  91.26,77.27 180 top
R10  1M  [0603]  88.56,76.47 90 top
R11  1M  [0603]  85.73,74.3 0 top
R12  470K  [0603-0RTOP]  106.8,18.7 0 top
R13  0R  [0603-0RTOP]  106.8,16.9 180 top
R14  33K  [0603]  113,52.1 0 top
R15  0R  [0603-0RTOP]  134.33,10.16 90 top
R16  10K  [0603-0RTOP]  118.18,64.3 90 top
R17  10K  [0603-0RTOP]  120.08,64.3 90 top
R18  649R  [0603]  144.2,77.8 270 top
R19  649R  [0603]  146.4,77.8 270 top
R20  100K  [0603-ARRAY]  140.5,78.5 0 top
R21  100K  [0603-ARRAY]  140.3,73.5 270 top
R22  1M  [0603]  130.3,67.3 0 top
R23  10K  [0603-0RTOP]  113.4,91.4 270 top
R24  1M  [0603]  120.2,59.6 180 top
R25  0.22R  [0603-0RTOP]  99.5,89.4 180 top
R26  10K  [0603-0RTOP]  117,93.7 0 top
R27  3.3K  [0805]  35.09,14.11 270 top
R28  3.3K  [0805]  46.09,13.61 270 top
R29  1M  [0603]  34.45,23.51 270 top
R30  1M  [0603]  46.09,23.61 90 top
R31  1M  [0603]  19.23,61.36 270 top
R32  1M  [0603]  20.58,55.84 180 top
R33  4.7K  [0603]  27.33,59.15 270 top
R34  1K  [0603]  25.18,59.12 90 top
R35  3k  [0603]  25.55,62.36 0 top
R36  1k  [0603]  24.3,64.36 0 top
R37  300R  [0603]  104.65,49.78 0 top
R151  470R  [0603]  124.05,90.29 90 top
R152  470R  [0603]  125.85,90.29 90 top
R153  CSR1206FK25L0  [R1206]  63.39,63.29 0 top
R154  0.025R  [0805]  50.69,43.48 0 top
R155  CSR1206FK25L0  [R1206]  63.39,60.69 0 top
R156  1M  [R0603]  39.37,40.09 90 top
R157  10  [R0603]  59.79,59.19 90 top
R158  10  [R0603]  67.29,59.29 90 top
R159  1M  [R0603]  44.67,36.96 180 top
R160  178k,1%  [R0603]  79.29,65.41 180 top
R161  0  [R0603]  77.09,63.08 180 top
R162  10k  [R0603]  44.56,45.6 180 top
R163  0  [R0603]  77.09,60.98 180 top
R164  5.90k,1%  [R0603]  65.89,51.29 180 top
R165  93.1k,1%  [R0603]  68.19,54.19 180 top
R166  20.0k,1%  [R0603]  82.99,65.31 0 top
R167  100k  [R0603]  62.45,50.04 270 top
R168  0.025R  [0805]  49.99,35.08 0 top
R169  CSR1206FK25L0  [R1206]  66.79,46.09 0 top
R170  1M  [0603]  38.79,30.05 270 top
R171  10  [R0603]  64.75,42.74 90 top
R172  10  [R0603]  69.85,42.74 90 top
R173  1M  [0603]  43.29,28.25 0 top
R174  1M  [0603]  38.79,33.75 90 top
R175  3.3K  [0805]  58.09,13.81 270 top
R176  3.3K  [0805]  73.14,18.05 270 top
R177  178k,1%  [R0603]  80.65,33.04 90 top
R178  0  [R0603]  73.05,39.04 270 top
R179  10k  [R0603]  39.69,36.85 0 top
R180  0  [R0603]  78.25,33.04 270 top
R181  5.90k,1%  [R0603]  67.05,34.14 0 top
R182  93.1k,1%  [R0603]  64.15,38.74 270 top
R183  1M  [0603]  57.99,22.51 270 top
R184  1M  [0603]  70.65,21.48 0 top
R185  20.0k,1%  [R0603]  66.95,32.04 0 top
R186  100k  [R0603]  70.95,39.04 90 top
R187  47K  [0603]  34.89,40.45 180 top
R188  0.12R  [0805]  39.91,53.32 90 top
R189  0.047R  [0805]  38.71,64.48 90 top
R190  47K  [0603]  34.99,35.75 0 top
R191  10K  [0603]  28.91,53.82 0 top
R192  1.65M  [0603]  35.51,51.02 90 top
R193  10K  [0603]  29.01,68.68 0 top
R194  3.09M  [0603]  33.51,64.68 90 top
R195  1M  [0603]  29.11,72.78 180 top
R196  1M  [0603]  32.11,51.02 270 top
R197  1M  [0603]  31.61,64.68 270 top
R198  10  [R0603]  54.95,93.57 90 top
R199  0R  [R0603]  48.25,85.57 90 top
R200  1M  [R0603]  45.95,82.37 0 top
R201  1M  [R0603]  45.95,80.17 0 top
R202  DNP  [R0603]  49.65,82.37 0 top
R203  DNP  [R0603]  49.65,80.17 0 top
R204  1k  [R0603]  42.95,85.97 270 top
R205  100k  [R0603]  44.95,85.97 270 top
R206  33  [R0603]  38.71,83.62 180 top
R207  3.3k  [R0603]  23.42,81.74 180 top
R208  6.8k  [R0603]  23.42,79.64 0 top
R209  120k  [R0603]  20.58,77.04 270 top
R210  1M  [R0603]  19.68,69.94 180 top
R211  3.9k  [R0603]  19.68,72.34 0 top
TP1  [SMD_ROUND_1MM]  101.7,44 0 top
TP2  [SMD_ROUND_1MM]  101.05,36.42 0 top
TP3  [SMD_ROUND_1MM]  115,46.5 0 top
TP4  [SMD_ROUND_1MM]  113,46.48 0 top
TP5  [SMD_ROUND_1MM]  111.54,46.48 0 top
TP7  [SMD_ROUND_1MM]  137.6,55.9 0 top
TP8  [SMD_ROUND_1MM]  97.98,26.48 180 top
TP9  [SMD_ROUND_07MM]  140.33,63.09 90 top
TP11  [SMD_ROUND_07MM]  93.45,45.6 90 top
TP12  TP_0812  [TP_0.8_1.2]  91.55,45.6 0 top
TP60  [SMD_ROUND_07MM]  137.39,94.21 270 top
TP61  TPB1,27  [B1,27]  39.54,75.76 0 top
TP62  TPB1,27  [B1,27]  87.95,48.34 0 top
TP63  TPB1,27  [B1,27]  34.49,32.25 0 top
TP64  TPB1,27  [B1,27]  40.31,49.22 0 top
TP65  TPB1,27  [B1,27]  62.63,71.91 0 top
TP66  TPB1,27  [B1,27]  42.91,49.22 0 top
TP67  TPB1,27  [B1,27]  65.43,71.91 0 top
TP68  TPB1,27  [B1,27]  29.81,58.42 0 top
TP69  [P1-13@1]  42.65,81.57 0 top
U1  LTC1955  [LFCSP_5X5_032]  101.6,16.2 0 top
U2  HRXL-MAXSONAR-WRC-MB7387  [HRXL-MAXSONAR-WRC-MB7387]  104.5,95.5 0 top
U3  ADS1015  [MSOP10]  22.32,60.09 0 top
U6  TPS43061  [QFN16_3X3_EP]  63.49,54.89 180 top
U7  TPS43061  [QFN16_3X3_EP]  71.85,34.24 0 top
U8  TPA3111D1PWP  [TSSOP28_EP]  48.55,91.77 90 top
U9  OPA322SAIDBVT  [SOT23-6']  23.58,75.68 180 top
X1  FH12-10S-0.5S1.00MM  [CON-FPC-1.0MM-10POS]  74.24,6.77 0 top
X2  MINI-USB_4P-85-32004-10X  [85-32004-10X]  146.69,88.27 180 top

## Library data of the parts
B1 = Keystone
C1 C2 C4-C37 C59 C114 C115 C121 C134 C135 C142 C149-C164 C172 D7 D8 D17 D19 D23 D24 L1 L2 L17 R1 R3-R19 R22-R37 R151 R152 R154 R168 R170 R173-R176 R183 R184 R187-R197 = discrete
C122 C123 C128-C130 C136 C137 C180 C181 = Brenneman; MANUFACTURER: Samsung; MFR_PN: CL31A226KAHNNNE
C124 C138 = Brenneman; MANUFACTURER: Samsung; MFR_PN: CL10C101JB8NCNC
C125 C126 C132 C139 C140 C147 = Brenneman; MANUFACTURER: Murata; MFR_PN: GRM188R71H104KA93D
C127 C141 = Brenneman; MANUFACTURER: Samsung; MFR_PN: CL10A475KA8NQNC
C131 = Brenneman; MANUFACTURER: Samsung; MFR_PN: CL10C131JB8NNNC
C133 C174 C175 C177 = Brenneman; MANUFACTURER: Samsung; MFR_PN: CL10B153KB8NNNC
C143-C145 C171 = Brenneman; MANUFACTURER: Samsung; MFR_PN: CL32B106KBJNNWE
C146 = Brenneman; MANUFACTURER: Samsung; MFR_PN: CL10C101JB8NNNC
C148 = Brenneman; MANUFACTURER: Samsung; MFR_PN: CL10B103KB8NNNC
C165 C166 = Brenneman; MANUFACTURER: Kemet; MFR_PN: EEV227M016A9HAA
C167 C168 C182-C186 Q24 R200-R211 = Brenneman
C169 C170 C176 C179 = Brenneman; MANUFACTURER: Samsung; MFR_PN: CL10B102KB8NNNC
C173 C178 = Brenneman; MANUFACTURER: Taiyo Yuden; MFR_PN: TMK107B7474KA-TR
C187 = resistor
CN1 = adafruit
CN2 = elock_lib
D1 Q8 Q9 Q20 Q21 = InfineonTech-AON
D2 D3 D27 D29 = st-microelectronics-AOM
D4 D20 D22 D30 IC5 IC7 = NXP-AOM
D5 D6 D25 D26 Q15 Q18 = Vishay-AON
D9 D21 D28 D31 = DiodesInc-AON
D32 F3 = Littelfuse
DRILEGEND = drilegend
FID1-FID3 = technol
H1-H5 = SparkFun-Hardware
IC1 = Intersil-U
IC2 IC9 = TexasInstruments-AON
IC3 IC4 IC6 IC19 = Microchip-AON
IC8 = Micron-U
IC18 = FTD-AON
IC20 IC21 U1 = LinearTech-AON
J1 J47 = CON-Hirose-AON
J2 J3 J8 J11 J12 J41 = CON-pinHeader-AON
J5 J6 J14-J16 J43-J45 J48 J49 = Tyco-U
J7 J9 = Stewart
J10 = C&K_Components-U
J13 J46 = TE-Conn-U
JP2-JP5 = ChipTestJig
L3 = Taiyo-Yuden-U
L11 = Brenneman; MANUFACTURER: Coilcraft; MFR_PN: SER2013-472ML
L12 = Brenneman; MANUFACTURER: Bourns; MFR_PN: SRR1280-1x0M
L13 L14 = Sumida-UT
L15 L16 = Brenneman; MANUFACTURER: Laird; MFR_PN: HI1812V101R-10
Q2 Q5 Q22 Q23 = Fairchild-AON
Q3 = Semtech-AOM
Q4 = TXC_Tech-U
Q6 = Citizen
Q7 = Toshiba-AON
Q14 Q17 = Touchstone-U
Q16 Q19 = Brenneman; MANUFACTURER: TI; MFR_PN: CSD87331Q3D
R2 R20 R21 = Panasonic-AON
R153 R155 R169 = Brenneman; MANUFACTURER: Stackpole; MFR_PN: CSR1206FK25L0
R156 R159 R167 R186 = Brenneman; MANUFACTURER: Panasonic; MFR_PN: ERJ-3GEYJ104V
R157 R158 R171 R172 R198 R199 = Brenneman; MANUFACTURER: Rohm; MFR_PN: MCR03ERTJ100
R160 R177 = Brenneman; MANUFACTURER: Panasonic; MFR_PN: ERJ-3EKF1783V
R161 R163 R178 R180 = Brenneman; MANUFACTURER: Panasonic; MFR_PN: ERJ-3GEY0R00V
R162 R179 = Brenneman; MANUFACTURER: Panasonic; MFR_PN: ERJ-3GEYJ103V
R164 = Brenneman; MANUFACTURER: Panasonic; MFR_PN: ERJ-3EKF5901V
R165 = Brenneman; MANUFACTURER: Panasonic; MFR_PN: ERJ-3EKF9312V
R166 R185 = Brenneman; MANUFACTURER: Panasonic; MFR_PN: ERJ-3EKF2002V
R181 R182 = Brenneman; MANUFACTURER: Panasonic; MFR_PN: ERJ-3EKFxxxxV
TP1-TP5 TP7-TP9 TP11 TP12 TP60-TP69 = testpad
U2 = elocktech_lib
U3 = SparkFun-AnalogIC; PROD_ID: IC-12239
U6 U7 = Brenneman; MANUFACTURER: TI; MFR_PN: TPS43061RTE
U8 = Brenneman; MANUFACTURER: TI; MFR_PN: TPA3111D1PWP
U9 = Brenneman; MANUFACTURER: TI; MFR_PN: TPA322SAIDBV
X1 = con-hirose
X2 = con-cypressindustries; OC_FARNELL: unknown; OC_NEWARK: unknown

## Nets
3V3_AUD: C180.1 C181.1 C182.1 R206.1 R207.1 U9.6
5V_ON: C163.1 IC3.92 IC21.1 R195.1
18V_GND: CN1.GND JP2.P1 R34.1 U3.5
18V_SENSE: CN1.PWR JP2.P2 R33.2
+3.3V: C1.1 C2.1 C5.1 C6.1 C8.1 C9.1 C16.2 C17.1 C29.2 C157.1 C159.2 D1.2 D27.+ D31.4 D31.5 IC3.2 IC3.16 IC3.37 IC3.46 IC3.62 IC3.86 J1.9 J3.25 J8.10 J11.2 L13.2 Q7.1 Q7.4 R1.2 R2.7 R2.8 R12.2 R14.2 R15.2 R37.2 R167.2 R186.2 R187.2 R190.2 R192.1 TP9.P$1 TP64.TP U1.1 U1.12 U1.13
+3.3V/1: C22.1 C33.1 IC5.7 IC5.8 IC6.8 IC8.3 IC8.7 IC8.8 J49.2 Q7.6 Q7.P1 R16.2 R17.2 R24.1 R31.2 R32.2 R200.1 R201.1 R205.2 R206.2 TP8.P$1
+3.3V/2: C14.1 C35.2 IC2.8 J2.2 J8.1 Q7.3 Q7.P2 R11.2 R26.2 U2.6
+5V: C37.1 C156.1 C158.1 C160.2 D28.+ L14.2 R194.1 TP65.TP U3.8
+SMB: C11.1 C27.1 C28.1 C135.1 C149.1 C150.1 C151.1 C152.1 C153.1 C154.1 C155.1 C187.+ D2.A D32.C F3.2 IC9.5 IC20.6 IC20.8 IC21.6 IC21.8 J1.10 J3.13 J7.2 J8.7 J9.2 Q2.4 Q5.4 Q15.3 Q18.3 R3.1 R20.6 R156.2 R170.1 R188.2 R189.2 TP63.TP
+SMB_PRE: F3.1 J45.4 JP5.P2
/3.3V1_ON: IC3.95 Q7.2
/3.3V2_ON: IC3.94 Q7.5
/3.3V3_ON: IC3.61
/CL_CS1: IC3.1 J3.19
/CL_CS2: IC3.17 J1.7
/CTS: IC18.11 J41.2
/FMEM1_CS: IC3.28 IC8.1 R24.2
/MCLR: IC3.13 IC4.4 J11.1 R14.1
/MCLR2: IC4.6 J12.1
/RAM_CS: IC3.3 J8.13
/RTS: IC18.3 J41.6
/SM_FAULT: IC3.21 U1.24
/XB_RESET: IC3.18 J2.6
A1: J7.3 J9.3 L2.2
A+: IC2.6 L2.1 Q3.3 R9.1 R11.1
ACT_EN_B: IC3.54
ACT_S1_B: IC3.52 Q20.1 R183.1
ACT_S2_B: IC3.53 Q21.1 R184.1
ACT_S3_B: IC3.88 Q9.1 R30.1
ACT_S4_B: IC3.49 Q8.1 R29.1
AGND: C165.2 C166.2 C167.2 C168.2 C169.2 C170.2 C171.2 C172.2 C176.2 C177.1 C179.2 C180.2 C181.2 C182.2 J46.1 J46.3 J46.5 J47.3 J47.4 J48.1 L17.2 Q24.2 R202.2 R203.2 R210.2 R211.2 U8.3 U8.4 U8.8 U8.19 U8.24 U8.EP U9.2
AUD_AMP_FAULT#: R204.1 R205.1 U8.1 U8.2
AUD_AMP_G0: IC3.41 R200.2 R202.1 TP4.P$1 U8.5
AUD_AMP_G1: IC3.42 R201.2 R203.1 TP5.P$1 U8.6
AUD_AMP_INN: C177.2 U8.11
AUD_AMP_INP: C174.2 C175.2 U8.12
AUD_AMP_SD#: R204.2 TP69.1
AUD_BSN: C178.1 U8.22 U8.26
AUD_BSP: C173.1 U8.17 U8.21
AUD_GVDD: C172.1 U8.9 U8.10
B1: J7.4 J9.4 L1.2
B12_BOOT: C126.1 U6.11
B12_COMP: C131.1 R164.2 U6.3
B12_FB: R160.1 R166.2 U6.4
B12_FEED: L11.2 R153.2 R155.2 R158.2
B12_HDRV: R161.2 U6.13
B12_HG: Q16.3 R161.1
B12_ISNS+: C124.1 R157.1 U6.6
B12_ISNS-: C124.2 R158.1 U6.5
B12_L: D20.A L11.1 Q16.6 Q16.7 Q16.8
B12_LDRV: R163.2 U6.8
B12_LG: Q16.5 R163.1
B12_PG: IC3.69 R167.1 U6.14
B12_RC: C133.1 R164.1
B12_RT: R165.2 U6.1
B12_SS: C132.1 U6.2
B12_SW: C126.2 Q16.4 U6.12
B12_VCC: C127.1 U6.10
B-: IC2.7 L1.1 Q3.2 R9.2 R10.2
BAT_GND: JP3.P1 JP4.P1 R36.1 U3.7
BAT_SENSE: JP3.P2 JP4.P2 R35.2
BTN_1: IC4.1 J5.2 J12.4 R2.2 R2.3
BTN_1PIN_B: C12.1 IC3.90 R2.6
BTN_2: IC4.3 J6.2 J12.5 R2.1 R2.4
BTN_2PIN_B: C13.1 IC3.89 R2.5
CL_IRQ: IC3.20 J1.4 J3.9
CM_RST: IC3.98 J8.5
DCDC12VIN: C122.1 C123.1 C125.1 Q14.4 R153.1 R154.2 R155.1 R157.2 U6.7
DCDC_12V_EN: IC3.84 Q15.2 R162.2 U6.15
DGND: B1.- C1.2 C2.2 C4.2 C5.2 C6.2 C7.2 C8.2 C9.2 C10.1 C11.2 C12.2 C13.2 C14.2 C16.1 C17.2 C18.1 C19.1 C20.1 C21.2 C22.2 C23.2 C24.2 C25.2 C26.2 C27.2 C28.2 C29.1 C32.2 C33.2 C34.2 C35.1 C36.2 C37.2 C59.2 C114.1 C115.1 C121.1 C122.2 C123.2 C125.2 C127.2 C128.2 C129.2 C130.2 C131.2 C132.2 C133.2 C134.2 C135.2 C136.2 C137.2 C139.2 C141.2 C142.2 C143.2 C144.2 C145.2 C146.2 C147.2 C148.2 C149.2 C150.2 C152.2 C153.2 C154.2 C156.2 C157.2 C158.2 C161.2 C162.2 C163.2 C164.2 C187.- CN2.1 CN2.2 D4.A D5.A D6.A D9.- D21.- D25.A D26.A D27.- D28.- D29.A D30.A D31.1 D31.2 D32.A H1.P1 H2.P1 H3.P1 H4.P1 H5.P1 IC1.3 IC2.5 IC3.15 IC3.31 IC3.36 IC3.45 IC3.65 IC3.75 IC4.2 IC5.4 IC5.5 IC5.6 IC6.1 IC6.2 IC6.3 IC6.4 IC6.7 IC7.7 IC7.12 IC8.4 IC9.2 IC18.7 IC18.18 IC18.21 IC18.25 IC18.26 IC19.4 IC20.4 IC21.4 J1.1 J2.1 J3.23 J5.1 J6.1 J7.1 J7.6 J8.9 J9.1 J9.6 J10.C5 J11.3 J12.3 J13.1 J15.1 J16.1 J41.1 J43.1 J44.1 J45.1 JP5.P1 L17.1 Q2.1 Q3.1 Q5.1 Q8.2 Q9.2 Q14.1 Q14.2 Q15.1 Q16.EP Q17.1 Q17.2 Q18.1 Q19.EP Q20.2 Q21.2 R5.1 R6.1 R10.1 R13.1 R20.2 R21.5 R21.6 R22.1 R25.1 R29.2 R30.2 R162.1 R165.1 R166.1 R174.2 R179.1 R182.1 R183.2 R184.2 R185.1 R195.2 R196.2 R197.2 TP11.P$1 TP12.1 TP66.TP TP67.TP U1.9 U1.10 U1.21 U1.PAD U2.7 U3.3 U6.9 U6.16 U6.EP U7.9 U7.16 U7.EP X1.7 X1.8 X2.4
DIN_SM: IC3.6 U1.27
DOOR_L: IC3.73 R21.2 R21.3
DOOR_L_SW: C25.1 J13.2 R18.2 R21.7
DOOR_ON: IC3.87 Q5.5 R20.7
DOOR_R: IC3.83 R21.1 R21.4
DOOR_R_SW: C26.1 J13.3 R19.2 R21.8
DOUT_SM_B: IC3.7 U1.28
GNDBREAK: CN1.GNDBREAK
ID_PWM: IC3.51 R23.1
IOB: J10.C7 U1.20
ISEN_OP_EN: C134.1 IC3.68 IC19.8
ISENSEA: IC3.43 IC19.1 IC19.2
ISENSEB: IC3.44 IC19.6 IC19.7
LCD_SI: IC3.32
LD_SM: IC3.9 U1.25
MIC_AMP_EN: J49.1 Q24.1 R210.1 U9.5
MICROPHONE: J48.2 R207.2 R208.1 U9.3
N$1: C10.2 IC3.85
N$2: C20.2 U1.15
N$3: B1.+ D1.1 TP7.P$1
N$4: Q14.5 Q15.5 Q15.6 R154.1
N$6: IC21.5 Q23.1
N$7: J10.C2 U1.19
N$8: C19.2 IC3.64 Q4.1
N$9: R26.1 U2.4
N$10: IC19.3 Q14.3
N$11: IC21.2 R193.2
N$12: D7.2 R27.1
N$13: C15.1 U1.11
N$14: C15.2 U1.14
N$15: D8.2 R28.1
N$16: C24.1 D1.3 IC7.14
N$17: C164.1 R193.1
N$18: R12.1 U1.23
N$19: R33.1 R34.2 U3.4
N$20: D30.K L14.1 Q23.3
N$21: R35.1 R36.2 U3.6
N$22: IC7.1 Q6.2
N$23: IC7.2 Q6.1
N$24: C155.2 IC21.7 Q23.2 R189.1
N$25: R13.2 U1.22
N$26: Q15.4 R156.1 R159.2
N$27: IC20.5 Q22.1
N$28: J10.C3 U1.18
N$29: IC20.2 R191.2
N$30: C162.1 R191.1
N$31: C161.1 IC20.1 TP68.TP
N$32: C160.1 IC21.3 R194.2 R197.1
N$33: D29.C L13.1 Q22.3
N$34: J10.C1 U1.17
N$35: Q5.6 R20.3
N$36: C18.2 IC3.63 Q4.3
N$37: C151.2 IC20.7 Q22.2 R188.1
N$38: C159.1 IC20.3 R192.2 R196.1
N$39: C23.1 C59.1 IC1.1 R37.1
N$40: Q5.2 Q5.3 R18.1 R19.1
N$43: C21.1 IC4.5 J12.2 R15.1
N$44: IC3.34 TP3.P$1
N$45: D23.2 R175.1
N$46: D24.2 R176.1
N$49: C7.1 IC3.30 R1.1
N$51: Q18.4 R170.2 R173.1
N$52: R199.1 U8.14
N$53: Q17.5 Q18.5 Q18.6 R168.1
N$55: IC3.60 TP2.P$1
N$61: IC19.5 Q17.3
N$62: C171.1 R198.1 R199.2 U8.7
N$63: C34.1 IC9.4 R23.2
N$64: C30.2 D4.K IC9.6 L3.1
N$65: C31.2 IC9.3 J14.1 R25.2
N$66: C30.1 D2.C D3.C IC9.1
N$67: C31.1 C32.1 D3.A J14.2 L3.2
N$68: C185.2 R211.1
N$69: C185.1 C186.1 R209.2 U9.4
N$70: C183.1 C184.1 C186.2 R209.1 U9.1
N$71: Q24.3 R208.2
N$72: C121.2 IC18.4 IC18.17 TP60.P$1
N$73: Q15.7 Q15.8 R159.1
N$74: Q18.7 Q18.8 R173.2
N$99: Q2.6 R3.2
N$134: D17.1+ IC18.22
N$135: D19.1+ IC18.23
N$136: D17.2 R151.1
N$137: D19.2 R152.1
OUT_S1: D23.1+ D25.C J43.2 J44.2 Q20.3
OUT_S2: D24.1+ D26.C J43.3 J44.3 Q21.3
OUT_S3: D5.C D7.1+ J15.2 J16.2 Q8.3
OUT_S4: D6.C D8.1+ J15.3 J16.3 Q9.3
OUTN_UNF: C178.2 L16.2 U8.23 U8.25
OUTP_UNF: C173.2 L15.2 U8.18 U8.20
P12V: C128.1 C129.1 C130.1 C165.1 C166.1 C167.1 C168.1 C169.1 C170.1 CN2.3 CN2.4 D20.K Q16.1_2 R160.2 R198.2 TP61.TP U8.15 U8.16 U8.27 U8.28
PGC: IC3.26 J11.5
PGD: IC3.27 J11.4
PHOTO_PIN: IC3.24 R8.1
PHOTO_PWR: IC3.25 R7.1
PHOTOCELL: J3.5 R7.2 R8.2
PIC_INT: IC3.38 J1.3 J3.7
RTC_CS: IC3.79 IC7.6 R22.2
RTC_INT: IC3.80 IC7.5
SBC_5V_VBUS: C114.2 C115.2 IC18.19 IC18.20 J41.3 R151.2 R152.2 X2.1
SBC_LINL: C184.2 J47.6
SBC_LINR: C183.2 J47.2
SBC_LOUTL: C175.1 J47.5
SBC_LOUTR: C174.1 J47.1
SBC_USB_B_D_N: IC18.16 X2.2
SBC_USB_B_D_P: IC18.15 X2.3
SCL1: IC3.57 IC5.2 IC6.6 J8.16 R16.1 R32.1 U3.1 U3.10
SCLK1: IC3.77 IC7.10 IC8.6
SCLK2: IC3.10 J1.5 J3.15 J8.12 U1.31
SCLK_SM_B: IC3.8 U1.26
SDA1: IC3.56 IC5.1 IC6.5 J8.15 R17.1 R31.1 U3.9
SDI1: IC3.72 IC7.8 IC8.2
SDI2: IC3.11 J1.8 J3.21 J8.11
SDO1: IC3.76 IC7.9 IC8.5
SDO2: IC3.12 J1.6 J3.17 J8.14
SM_C4A: U1.4 X1.2
SM_C8A: U1.3 X1.1
SM_CLK_A: U1.7 X1.4
SM_DATA: IC3.14 U1.29
SM_DET_A: U1.2 X1.10
SM_IO_A: U1.5 X1.3
SM_RST: IC3.5 U1.30
SM_RST_A: U1.6 X1.6
SM_SYNC: IC3.4 U1.32
SM_VCC_A: U1.8 X1.9
SMB_SCL: D31.6 IC3.66 J45.2 R190.1
SMB_SDA: D31.3 IC3.67 J45.3 R187.1
SNDR: IC3.35
SPKR1_P: C176.1 J46.2 L15.1
SPKR_N: C179.1 J46.4 L16.1
STR_BOOT: C140.1 U7.11
STR_COMP: C146.1 R181.2 U7.3
STR_FB: R177.1 R185.2 U7.4
STR_FEED: L12.2 R169.2 R172.2
STR_HDRV: R178.2 U7.13
STR_HG1: Q19.3 R178.1
STR_ISNS+: C138.1 R171.1 U7.6
STR_ISNS-: C138.2 R172.1 U7.5
STR_L: D22.A L12.1 Q19.6 Q19.7 Q19.8
STR_LDRV: R180.2 U7.8
STR_LG1: Q19.5 R180.1
STR_PG: IC3.74 R186.1 U7.14
STR_RC: C148.1 R181.1
STR_RT: R182.2 U7.1
STR_SS: C147.1 U7.2
STR_SW: C140.2 Q19.4 U7.12
STR_VCC: C141.1 U7.10
STRIKE_EN: IC3.47 Q18.2 R174.1 R179.2 U7.15
U1RX: IC3.70 IC18.1 J41.4
U1TX: IC3.71 IC18.5 J41.5
U2CTL: IC2.2 IC2.3 IC3.19 J3.26 J8.6
U2RX: IC2.1 IC3.81 J8.4
U2TX: IC2.4 IC3.82 J8.2
U3RX: IC3.23 J2.3
U3TX: IC3.33 J2.4
US-S_O: IC3.78 U2.5
VACT: C36.1 C142.1 C143.1 C144.1 C145.1 D9.+ D21.+ D22.K J15.4 J16.4 J43.4 J44.4 Q19.1_2 R27.2 R28.2 R175.2 R176.2 R177.2 TP62.TP
VPS_ON: IC3.100 J8.8 Q2.5 R5.2
VPS_PWR: J7.5 J9.5 Q2.2 Q2.3 R4.2
VPS_SEN: IC3.99 J8.3 R4.1 R6.2
VREF2.5: C4.1 IC1.2 IC3.29 TP1.P$1
VSOLAR: J1.2
VSUPLYACT: C136.1 C137.1 C139.1 Q17.4 R168.2 R169.1 R171.2 U7.7
XB_RTS: IC3.48 J2.7
XB_SLEEP: IC3.22 J2.5

## Tracks (layer width: path | path; a pad name or v marks a point on that pad's centre or on a via)
3V3_AUD  (via drill 0.3)
  Top 0.203: U9.6 24.53,73.18 v24.55,73.15 | C181.1 40.74,88.12 v41.57,88.95 | R207.1 24.27,83.36 v24.48,83.57
  Top 0.762: C180.1 39.21,82.06 39.52,82.37 39.52,83.58 R206.1 C182.1 39.56,87.97 C181.1
  SUPPLY 0.203: v24.55,73.15 24.55,82.73 24.83,83.01 | 24.83,83.01 36.21,83.01 41.6,88.39 41.6,88.92 v41.57,88.95 | v24.48,83.57 24.48,83.36 24.83,83.01
5V_ON  (via drill 0.3)
  Top 0.152: IC3.92 114.9,28.78 113.91,29.77 v113.05,29.77
  Top 0.203: C163.1 29.8,70.25 30.65,69.39 IC21.1 34.26,69.39 v34.61,69.04
  Top 0.356: R195.1 29.8,72.68 C163.1
  SUPPLY 0.152: v113.05,29.77 112.65,29.77 112.42,30 111.94,30 111.67,29.72 100.73,29.72 94.05,36.4 94.05,37.92 v94.23,38.1 | v92.53,38.84 92.53,47.45 v92.66,47.59
  Bottom 0.152: v94.23,38.1 93.26,38.1 v92.53,38.84
  Bottom 0.203: v34.61,69.04 35.61,68.04 35.65,68.04 36.01,67.69 36.01,67.33 39.35,63.99 41.7,66.34 82.06,66.34 84.4,64.01 84.4,52.91 86.02,51.28 88.97,51.28 v92.66,47.59
18V_GND
  Top 0.305: R34.1 25.18,57.48 | 25.18,57.48 25,57.3 23.5,57.3 23.32,57.48 U3.5 | 25.18,57.48 25.18,55.08 24.7,54.6 17.1,54.6 16.3,55.4 16.3,56.4 11.3,61.4 8.99,61.4 CN1.GND
  SUPPLY 1.016: JP2.P1 4.55,34.92 2.92,34.92 1.87,35.97 1.87,57.61 CN1.GND
18V_SENSE  (via drill 0.3)
  Top 0.508: R33.2 27.33,57.43 26.9,57 26.4,57 25.9,56.5 25.9,54.9 25,54 16.8,54 v14.25,56.55
  SUPPLY 1.016: JP2.P2 4.6,45.5 3.3,46.8 3.3,52.6 5.5,54.8 12.5,54.8 v14.25,56.55 14.4,56.7 14.4,62.24 CN1.PWR
+3.3V  (via drill 0.3, 0.51)  (1 unrouted)
  Top 0.152: IC3.86 112.5,26.02 113.1,25.42 C6.1 113.67,23.52 v114.17,23.52 | U1.13 U1.12 101.31,13.51 101.31,12.89 101.49,12.72 C16.2 101.49,9.06 | C9.1 103.89,35.4 v103.85,35.43 | 101.49,9.06 101.36,8.94 97.33,8.94 97,9.27 v96.87,9.27 | v108.48,9.47 107.94,8.94 101.61,8.94 101.49,9.06 | R12.2 107.59,20.42 v108.02,20.85 | D1.2 139.77,60.94 v140.3,61.47
  Top 0.203: R186.2 70.95,40.98 71.29,41.33 v71.29,41.81 | C5.1 123.11,35.1 122.7,35.51 121.25,35.51 120.84,35.1 IC3.16 118.99,35.1 v118.56,34.67 | C1.1 122.81,27.73 v122.9,27.64 122.9,27.26 123.74,26.43 123.74,23.01 v124,22.76 | C8.1 113.18,42.61 v112.74,43.05 | C2.1 110.13,43.36 v110.84,44.07 | R1.2 118.8,45.55 v118.84,45.59
  Top 0.229: IC3.2 121.09,29.5 121.69,28.9 C1.1 | IC3.62 C9.1 | IC3.46 110.1,42.39 109.9,42.59 C2.1 | IC3.37 113.7,41.6 113.9,41.8 C8.1 | Q7.4 98.44,23.95 99,24.5 C29.2
  Top 0.254: R167.2 62.45,47.75 v62.96,47.24
  Top 0.279: U1.1 98.03,17.95 97.79,18.19 C17.1
  Top 0.305: R190.2 v35.78,34.44
  Top 0.356: R14.2 113.79,50.47 J11.2 | R2.7 R2.8 142.21,9.9 v141.7,10.41 | R15.2 v134.33,12.4 | D31.4 D31.5 34.54,38.05 34.82,37.77 34.82,36.91 35.07,36.65 35.63,36.65 35.78,36.5 R190.2 | v32.86,40.44 32.87,40.45 R187.2 | C17.1 97.76,19.23 v97.76,20.32 | v94.33,25.27 94.35,25.25 Q7.1 | C29.2 99.41,23.63 98.99,23.2 v98.05,23.2 | R37.2 105.44,47.68 v105.38,47.62
  Top 0.406: TP9.P$1 140.33,61.49 v140.3,61.47
  Top 0.508: R192.1 C159.2 39.3,50.23 TP64.TP | v87.93,20.95 92.58,20.95 93.44,21.82 98.11,21.82 v98.14,21.84
  Top 1.27: L13.2 51.01,54.65 51.91,53.75 C157.1 52.14,52.25 53.18,52.25 53.64,52.71 D27.+ 55.21,49.96 v54.96,49.71
  SUPPLY 0.152: v103.85,35.43 103.85,37.34 105.25,38.73 105.25,39.62 104.49,40.39 103.98,40.39 102.84,41.53 102.84,42.8 103.22,43.18 103.22,45.47 v105.38,47.62 | v114.17,23.52 115.28,23.52 116.96,21.84 122.52,21.84 122.84,21.52 | 122.84,21.52 120.95,19.62 120.95,14.38 119.9,13.33 J1.9 118.57,13.03 110.56,13.03 108.91,11.38 108.91,9.88 108.5,9.47 v108.48,9.47 | v96.87,9.27 87.93,18.21 v87.93,20.95 | v101.06,21.82 100.68,22.2 99,22.2 98.65,21.84 v98.14,21.84 | 122.84,21.52 124,22.67 v124,22.76
  SUPPLY 0.203: v110.84,44.07 111.47,44.7 | v118.84,45.59 118.84,46.99 118.08,47.75 116.51,47.75 J11.2
  SUPPLY 0.254: v62.96,47.24 62.96,48.44
  SUPPLY 0.305: v35.78,34.44 35.78,37.52 v32.86,40.44
  SUPPLY 0.356: TP64.TP 40.31,48.72 40.31,45.91 34.84,40.44 v32.86,40.44 | v97.76,20.32 98.14,20.7 v98.14,21.84 98.14,23.11 v98.05,23.2 95.98,25.27 v94.33,25.27 | v118.56,34.67 115.92,34.67 114.78,35.81 114.78,37.72 114.01,38.48 109.95,38.48 106.9,35.43 v103.85,35.43
  SUPPLY 0.508: v71.29,41.81 73.27,39.83 73.27,36.85 77.41,32.72 81.42,32.72 82.42,31.72 82.42,22.61 84.45,20.57 86.83,20.57 87.22,20.95 v87.93,20.95
  SUPPLY 0.61: v71.29,41.81 64.66,48.44 62.96,48.44 56.58,48.44 55.31,49.71 v54.96,49.71 54.45,49.71 53.03,48.28 46.58,48.28 46.04,47.75 45.1,47.75 44.95,47.6 41.22,47.6 40.31,48.51 40.31,48.72
  SUPPLY 0.762: 134.33,11.68 J1.9 | 134.33,11.68 v134.33,12.4 134.27,12.34 134.27,9.34 138.33,5.27 138.33,3.81 136.85,2.33 J3.25 | 134.33,11.68 140.35,11.7 141.64,10.41 v141.7,10.41 | v112.74,43.05 112.74,43.43 111.47,44.7 108.55,47.62 | v105.38,47.62 108.55,47.62 | 108.55,47.62 108.55,49.78 110.84,52.07 114.65,52.07 | 114.65,52.07 137,52.07 140.3,55.37 v140.3,61.47 | J11.2 114.66,52.06 114.65,52.07
  Bottom 0.152: v108.02,20.85 102,20.85 101.16,21.69 101.16,21.72 v101.06,21.82
  Bottom 0.203: v118.56,34.67 118.56,33.95 118.86,33.65 118.86,32.9 118.58,32.62 118.58,30.72 118.71,30.59 118.71,29.72 120.82,29.72 v122.9,27.64
  Bottom 0.356: v96.87,9.27 96.41,9.27 95.27,8.13 J8.10
+3.3V/1  (via drill 0.3)  (1 unrouted)
  Top 0.152: Q7.6 97.98,25.43 TP8.P$1 | v72.23,23.88 73.75,22.35 79.09,22.35 80.23,23.5
  Top 0.203: IC5.8 116.12,56.67 117.06,56.67 117.21,56.82 117.21,57.25 117.01,57.45 116.43,57.45 116.19,57.69 C22.1 116.19,59.4 116.35,59.56 117.57,59.56 118.94,60.94 120.95,60.94 120.99,60.89 R24.1 121.77,59.6 121.99,59.38 121.99,58.88 122.24,58.62 124.45,58.62 124.63,58.8 124.63,59.56 C33.1 | 80.23,23.5 83.03,26.29 v94.51,26.29 96.36,26.29 96.74,25.91 96.74,25.14 Q7.P1 | v15.46,72.52 15.71,72.26 15.71,68.96 17.7,66.98 17.7,61 18.12,60.58 R31.2 19.23,57.67 19.8,57.1 R32.2
  Top 0.254: IC5.7 v113.86,56.01 | 120.95,60.94 121.76,61.75 121.76,64.52 121.19,65.08 R17.2
  Top 0.356: Q7.6 96.85,25.25 Q7.P1 | IC8.7 126.07,56.63 126.33,56.9 126.33,57.72 126.14,57.91 | 126.14,57.91 IC8.8 | C33.1 125.85,59.6 126.14,59.31 126.14,57.91 | IC8.3 118.4,55.37 117.76,56.01 IC5.7 IC5.8 | R17.2 R16.2 117.25,65.08 117.04,64.87 117.04,62.53 116.75,62.25 IC6.8 | R206.2 37.86,83.48 37.05,82.68 35.4,82.68 v34.64,81.92 | R201.1 44.69,79.76 v41.5,79.76
  Top 0.762: R201.1 R200.1 44.95,82.52 R205.2
  SUPPLY 0.254: v113.86,56.01 111.83,56.01 107.87,52.05 103.92,52.05 93.59,41.72 93.59,28.65 94.51,27.74 v94.51,26.29
  SUPPLY 0.356: J49.2 6.91,79.54 7.71,78.74 7.71,74.04 9.24,72.52 v15.46,72.52 21.05,72.52 21.81,71.75 24.99,71.75 25.62,72.39 25.62,75.95 31.59,81.92 v34.64,81.92 36.8,79.76 v41.5,79.76
  Bottom 0.203: v72.23,23.88 69.69,23.88 68.55,25.02 55.47,25.02 53.05,27.43 33.49,27.43
+3.3V/2  (via drill 0.3)
  Top 0.152: Q7.3 94.94,23.95 94.73,23.75 v94.73,23.44 | J2.2 129.87,30.92 127.68,28.73 v127.35,28.73 | v122.52,23.37 122.34,23.19 122.34,22.62 121.76,22.04 v121.76,21.26
  Top 0.203: IC2.8 93.68,73.27 93.49,73.08 93.49,72.52 | 93.49,72.52 93.49,71.5 93.64,71.35 94.56,71.35 C14.1 94.58,70.59 | R11.2 87.59,74.3 v87.6,74.3 | v92.93,72.52 93.49,72.52
  Top 0.254: v95.37,70.21 94.96,70.21 94.58,70.59 | v117.52,92.2 117.79,92.47 R26.2
  Top 0.305: Q7.3 96.55,23.95 Q7.P2
  Top 0.356: C35.2 119.81,97.97 U2.6
  Top 0.508: R26.2 C35.2
  SUPPLY 0.152: v121.76,21.26 120.69,20.19 100.68,20.19 100.48,19.99 98.89,19.99 98.55,19.65 98.55,19.59 96.99,18.03 v96.56,18.03
  SUPPLY 0.254: v94.73,23.44 93.19,24.99 93.19,41.88 107.38,56.08 107.38,66.8 103.7,70.48 | 103.7,70.48 95.65,70.48 v95.37,70.21 | 103.7,70.48 117.7,84.48 117.7,92.1 117.59,92.2 v117.52,92.2
  Bottom 0.152: v94.73,23.44 94.73,19.86 v96.56,18.03 97.45,17.14 97.45,12.5 96.26,11.3 91.33,11.3 86.38,6.35 86.38,2.72 85.99,2.33 J8.1 | v127.35,28.73 125.37,26.75 125.37,26.52 122.52,23.67 v122.52,23.37
  Bottom 0.203: v87.6,74.3 87.6,73.03 88.16,72.47 89.84,72.47 90.17,72.14 90.26,72.14 92.55,72.14 v92.93,72.52
+5V  (via drill 0.3)
  Top 0.203: v22.4,65.1 21.24,65.1 C37.1
  Top 0.305: C160.2 R194.1 | U3.8 22.32,63.18 21.05,64.35 C37.1
  Top 0.356: C160.2 36.45,63.9 v36.47,63.91
  Top 0.508: D28.+ 55.03,63.12 v55.03,65.15 55.03,67.41 C158.1
  Top 0.61: C158.1 55.11,71.78 C156.1 55.03,71.91 55.03,73.41 55.49,73.86 57.68,73.86 58.23,74.42 61.56,74.42 62.63,73.36 TP65.TP
  Top 1.016: C156.1 54.96,71.93 52.9,71.93 51.75,70.78 L14.2
  SUPPLY 0.356: v36.47,63.91 53.79,63.91 v55.03,65.15
  Bottom 0.203: v36.47,63.91 27.07,63.91 27.05,63.89 23.61,63.89 v22.4,65.1
+SMB  (via drill 0.3, 0.4, 0.76)  (1 unrouted)
  Top 0.152: Q5.4 137.35,78.12 137.71,78.49 140.68,78.49 140.91,78.72 140.91,79.39 R20.6
  Top 0.203: C154.1 38.13,69.78 37.73,69.39 IC21.8 35.96,69.39 35.65,69.09 35.65,68.33 35.89,68.09 IC21.6 37.92,68.09 38.13,67.88 C155.1
  Top 0.305: C150.1 38.27,56.13 37.86,55.73 IC20.8 36.19,55.73 35.93,55.47 35.93,54.69 36.19,54.43 IC20.6 | R20.6 140.9,80.56 140.3,81.15 v140.18,81.15 | R3.1 80.09,78.48 v80.61,78.99
  Top 0.356: C28.1 112.83,86.91 112.44,87.3 IC9.5 | 36.19,55.73 36.19,56.97 36.51,57.3 C149.1 36.59,58.9 36.59,61.47 | Q15.3 40.72,40.53 40.31,40.94 R156.2 37.77,40.94 36.03,42.68 C135.1 31.61,42.68 v31.26,43.03 | R189.2 37.7,65.42 37.33,65.05 37.33,63.25 36.59,62.51 36.59,61.47 | 36.59,61.47 v37.89,61.47
  Top 0.406: C27.1 106,94.02 v105.3,94.72 106.8,94.72 107.18,94.34 108.26,94.34 D2.A | v115.16,86.87 113.55,86.87 C28.1
  Top 0.457: C154.1 38.52,70.46 38.37,70.61 37.76,70.61 37.51,70.86 C153.1
  Top 0.508: Q18.3 40.83,31.19 39.72,31.19 39.36,30.84 R170.1 37.66,30.84 36.25,32.25 TP63.TP | C155.1 R189.2 | Q2.4 75.65,74.94 75.28,75.31 C11.1
  Top 0.61: C153.1 C152.1 | C11.1 71.46,75.31 70.81,74.65 v70.81,72.24
  Top 0.762: C151.1 39.96,54.21 R188.2 39.91,54.75 39.21,55.45 C150.1
  Top 1.016: F3.2 17.98,12.93 D32.C 20.46,12.64 v22.29,14.48
  Top 1.651: F3.2 13.74,22.13 18.91,27.3 C187.+
  SUPPLY 0.356: v80.61,78.99 76.8,75.18 70.81,75.18 | v140.18,81.15 124.14,81.15 122.43,82.87 122.43,91.89 120.9,93.41 117.12,93.41 116.71,93 116.71,88.42 v115.16,86.87
  SUPPLY 0.406: v115.16,86.87 113,86.87 105.3,94.56 v105.3,94.72 98.14,94.72 92.07,88.65 | 92.07,88.65 J9.2 | 92.07,88.65 92.07,82.2 88.87,78.99 v80.61,78.99
  SUPPLY 0.508: J3.13 120.03,3.6 120.03,7.98 | J1.10 120.03,9.57 120.03,7.98 | 120.03,7.98 115.23,7.98 114.85,7.59 101.01,7.59 100.27,8.33 95.83,8.33 94.02,6.53 94.02,3.62 J8.7
  SUPPLY 0.61: v70.81,72.24 70.81,75.18 70.81,86 68.17,88.65 J7.2
  SUPPLY 1.27: 41.19,59.89 39.59,61.49 38.24,61.49 38.22,61.47 v37.89,61.47 | 41.19,59.89 41.19,54.56 35.5,48.87 35.5,47.27 v31.26,43.03 31.26,35.48 TP63.TP 22.29,20.05 v22.29,14.48 22.29,11.46 25.3,8.45 57.08,8.45 67.86,19.23 77.77,19.23 88.66,8.33 95.83,8.33 | 41.19,59.89 52.01,59.89 53.66,61.54 68.44,61.54 70.81,63.91 v70.81,72.24
  Bottom 0.406: v31.26,43.03 31.08,43.03
+SMB_PRE
  Top 1.651: JP5.P2 8.83,7.81 9.48,8.46 F3.1 13.74,6.5 10.94,3.7 J45.4
/3.3V1_ON  (via drill 0.3)
  Top 0.152: IC3.95 116.1,25.18 v115.33,24.41 | v103.67,22.71 98.52,22.73 98.39,22.61 97.73,22.61 97.63,22.71 94.63,22.71 94.15,23.19 94.15,24.33 94.42,24.6 Q7.2
  Bottom 0.152: v103.67,22.71 103.77,22.71 104.55,23.49 105.88,23.49 105.89,23.5 106.27,23.5 106.52,23.75 113.57,23.75 113.92,24.1 115.03,24.1 v115.33,24.41
/3.3V2_ON  (via drill 0.3)
  Top 0.152: IC3.94 115.7,25.28 115.41,24.99 115.09,24.99 114.75,24.65 114.75,21.69 113.89,20.83 v111.73,20.83 | v102.33,23.37 102.33,25.53 101.44,26.42 100.81,26.42 99.92,25.53 98.77,25.53 98.52,25.27 98.52,24.77 98.35,24.6 Q7.5
  Bottom 0.152: v102.33,23.37 102.33,22.86 103.09,22.1 110.46,22.1 v111.73,20.83
/CL_CS1  (via drill 0.3)
  Top 0.152: IC3.1 120.98,29.1 121.38,28.7 121.38,28.32 123.41,26.29 v123.41,18.41 | J3.19 128.92,3.42 127.89,4.44 127.89,12.66 v124.55,16
  Bottom 0.152: v123.41,18.41 124.55,17.27 v124.55,16
/CL_CS2  (via drill 0.3)
  Top 0.152: J1.7 118.31,12.11 118.31,13.06 v119.47,14.22 | IC3.17 118.02,35.5 v117.95,35.43 | v121.76,22.86 121.45,22.55 121.45,22.49 121.18,22.21 121.18,18.99 119.47,17.29 v119.47,16.76
  Bottom 0.152: v117.95,35.43 117.95,34.1 118.53,33.52 118.53,33.03 118.25,32.76 118.25,30.58 118.38,30.45 118.38,25.27 119.96,23.7 120.92,23.7 v121.76,22.86 | v119.47,16.76 v119.47,14.22
/CTS
  Top 0.152: IC18.11 130.62,94.11 130.23,94.5 J41.2
/FMEM1_CS
  Top 0.152: R24.2 118.34,59.6 118.13,59.38 118.13,58.12 118.34,57.91 IC8.1